# EAGLE board SparkFun_Qwiic_Speaker_Amp-Panel (EAGLE 9.6.2), part 1 of 2
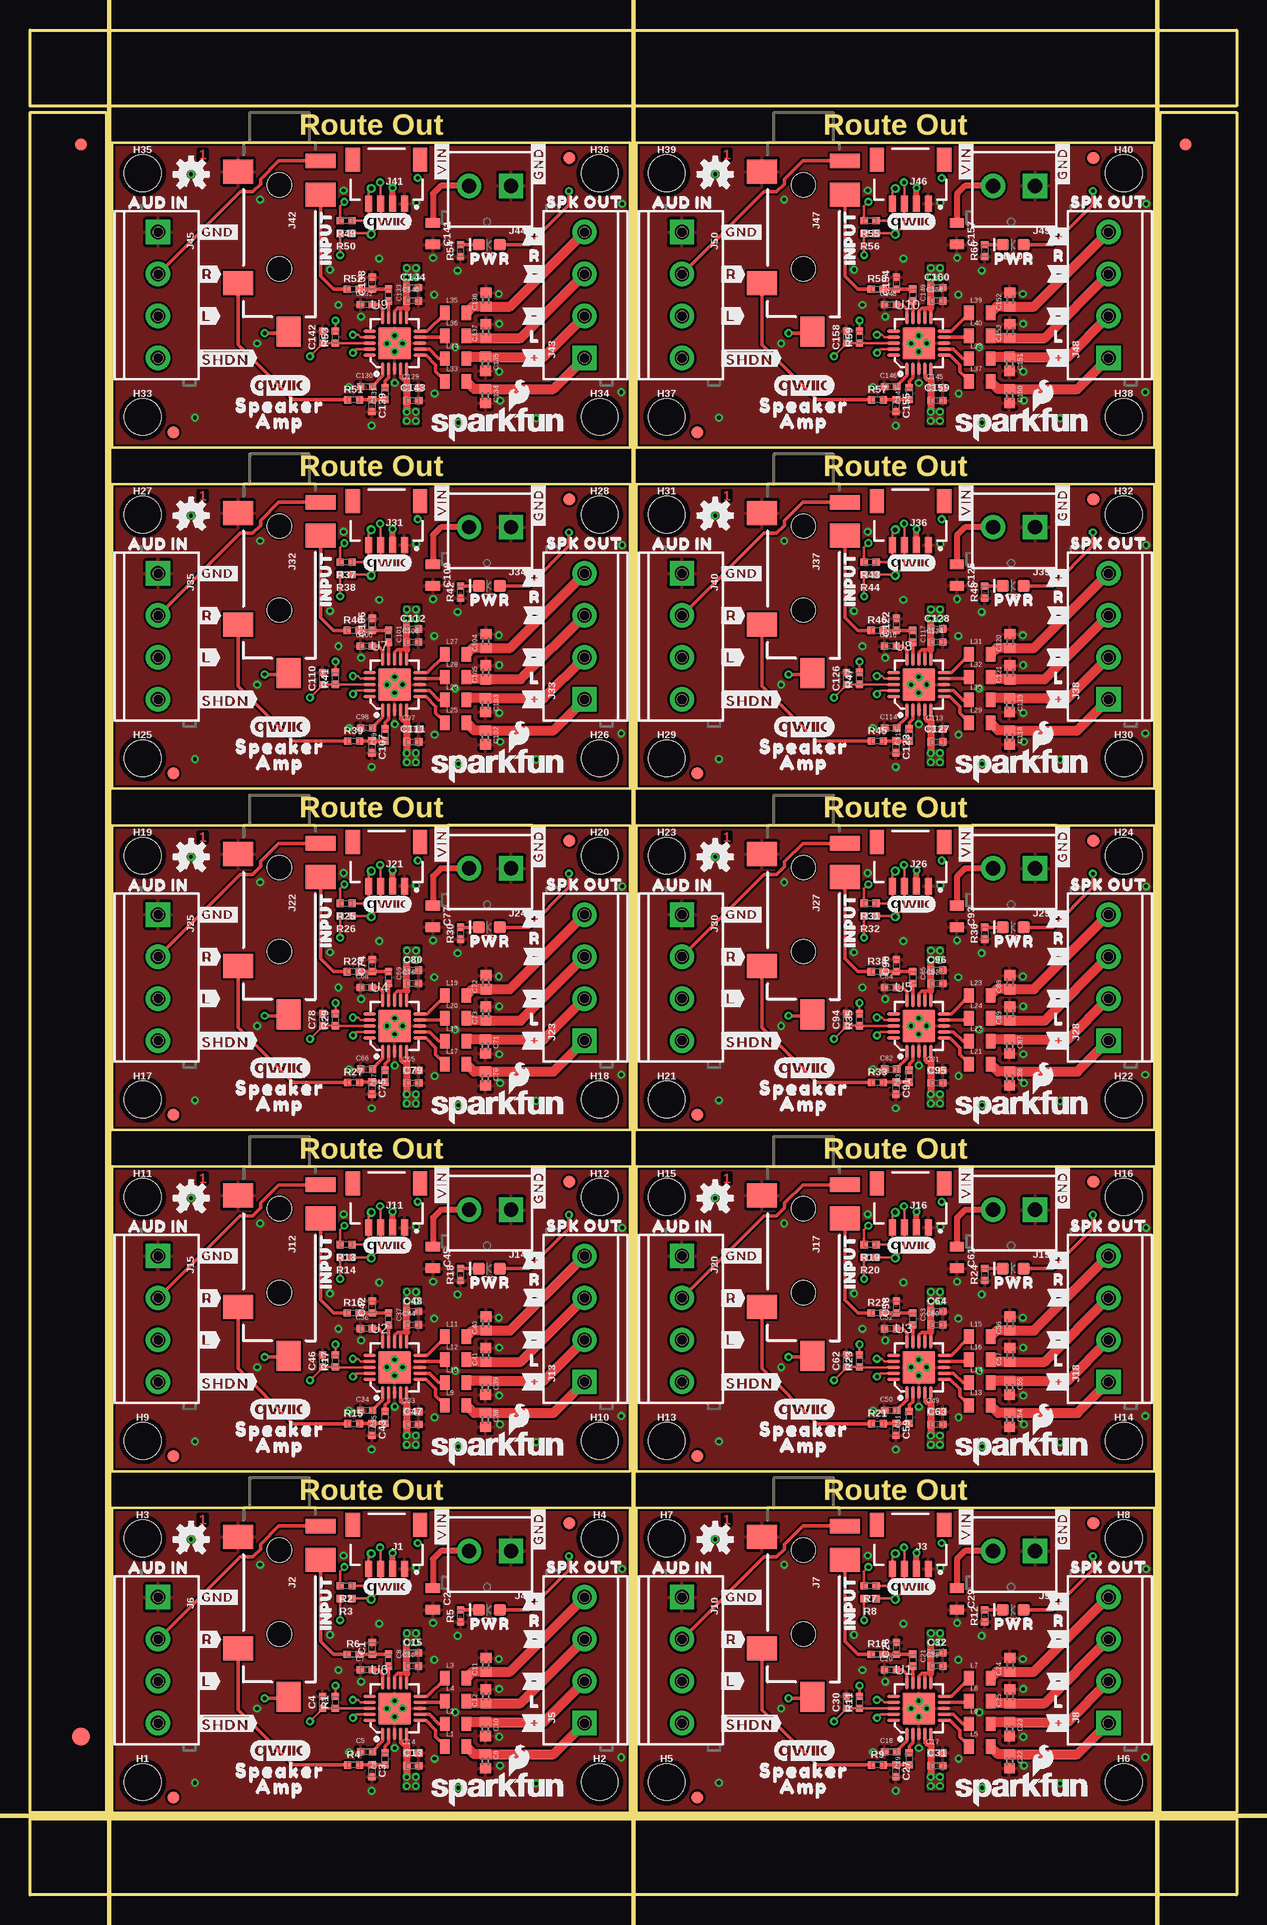
[diagram p0: board, top side]
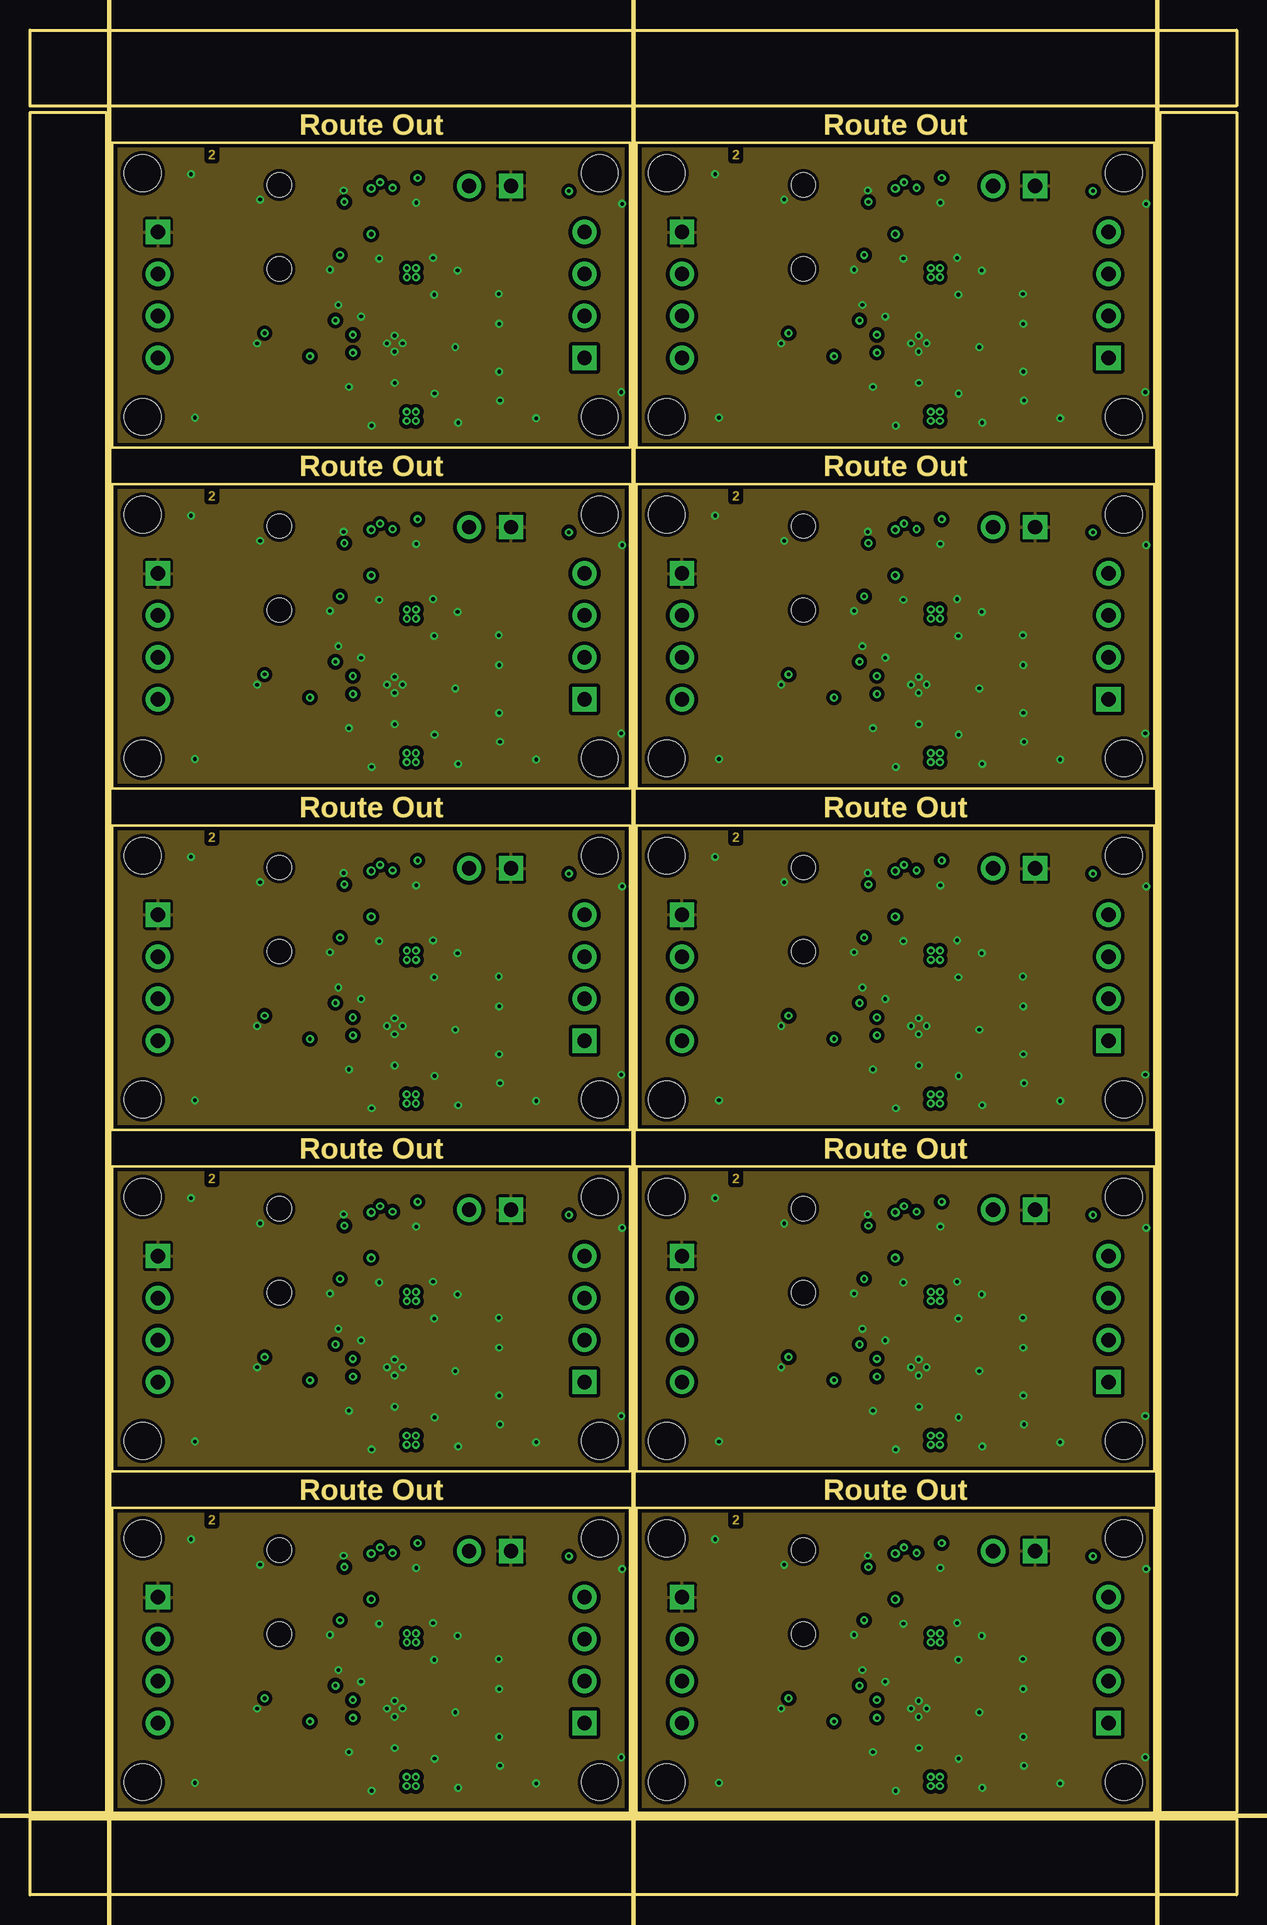
[diagram p1: board, inner layer Route2]
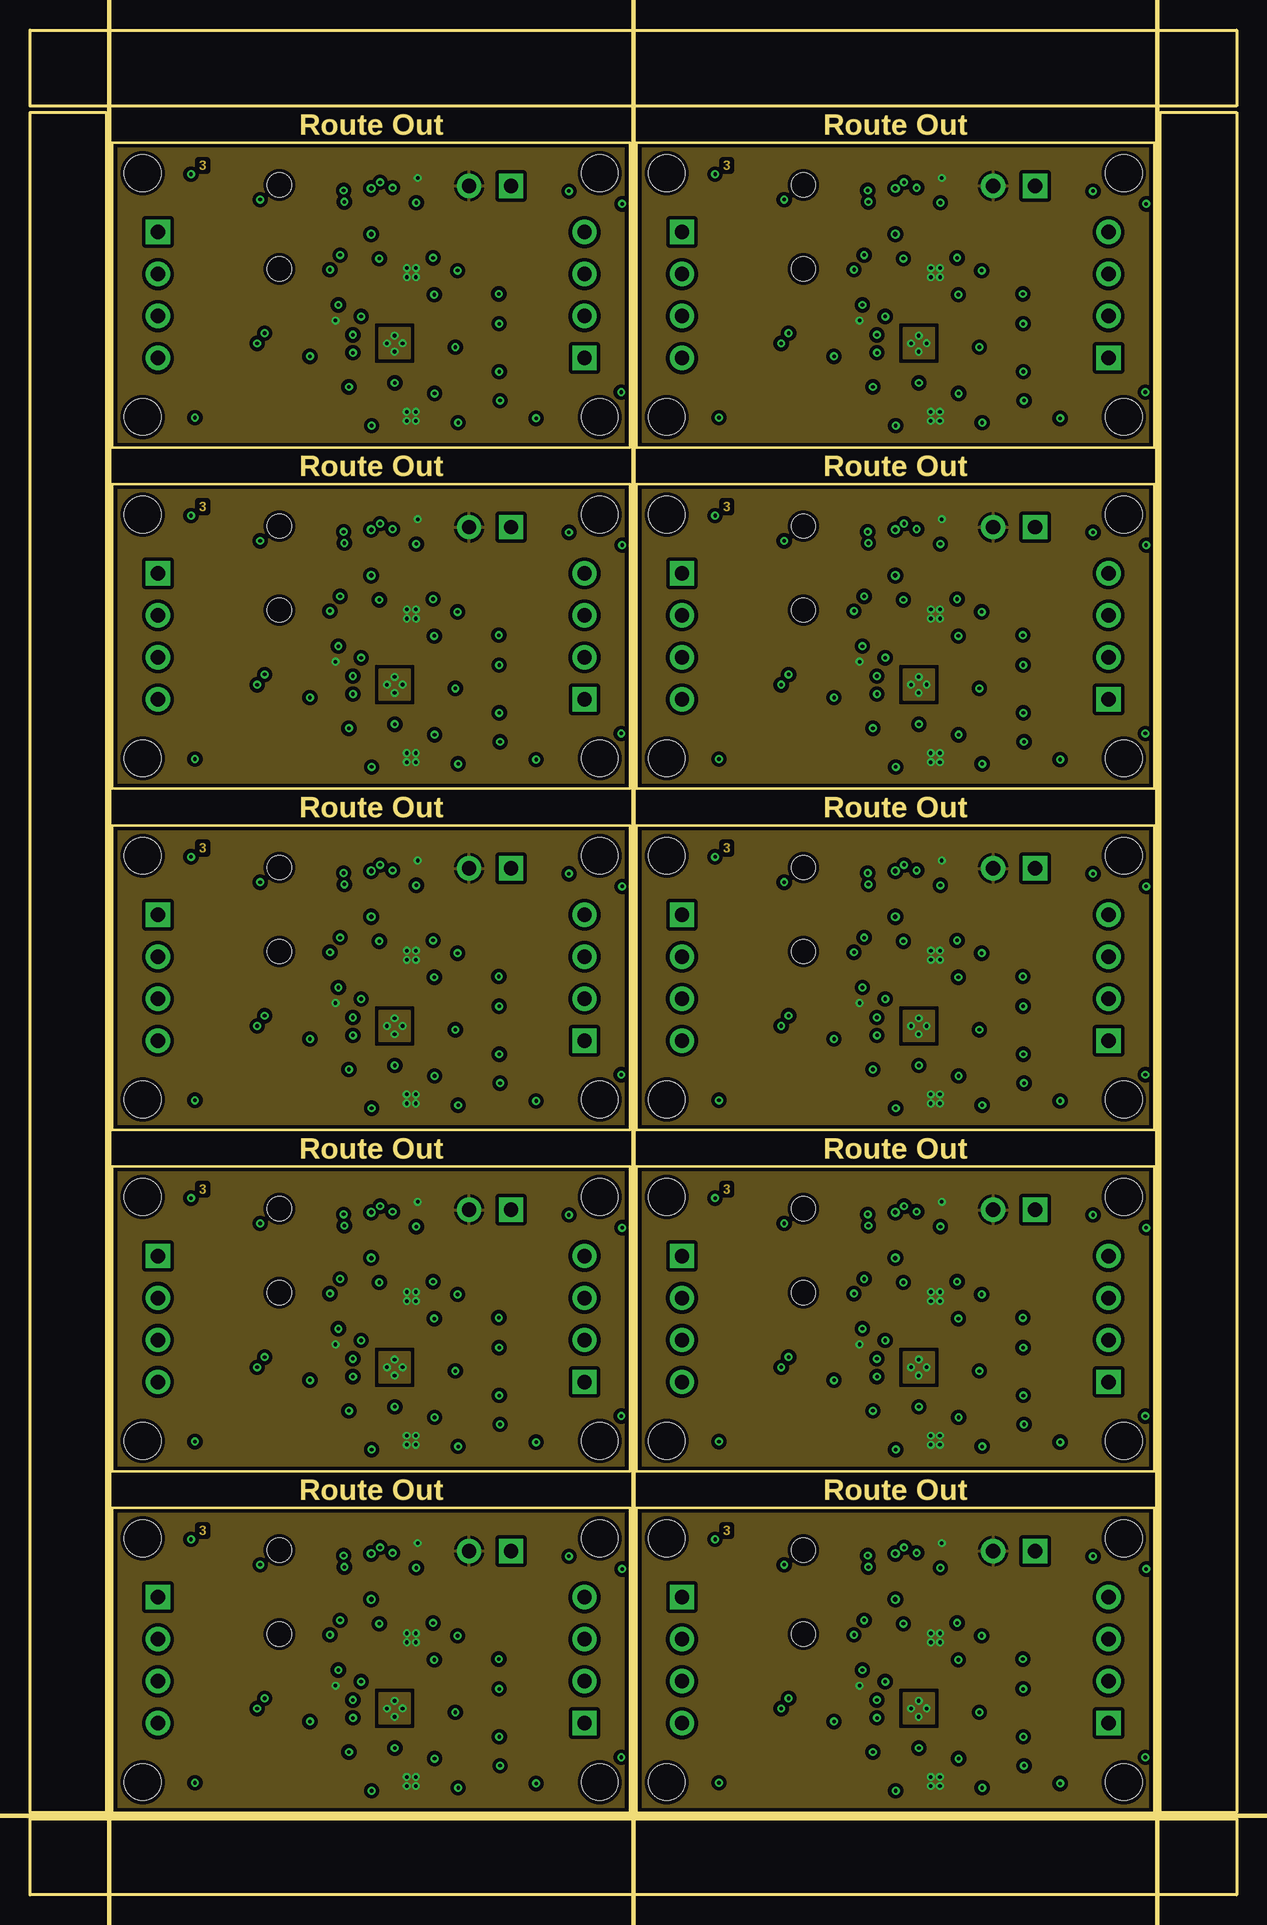
[diagram p2: board, inner layer Route15]
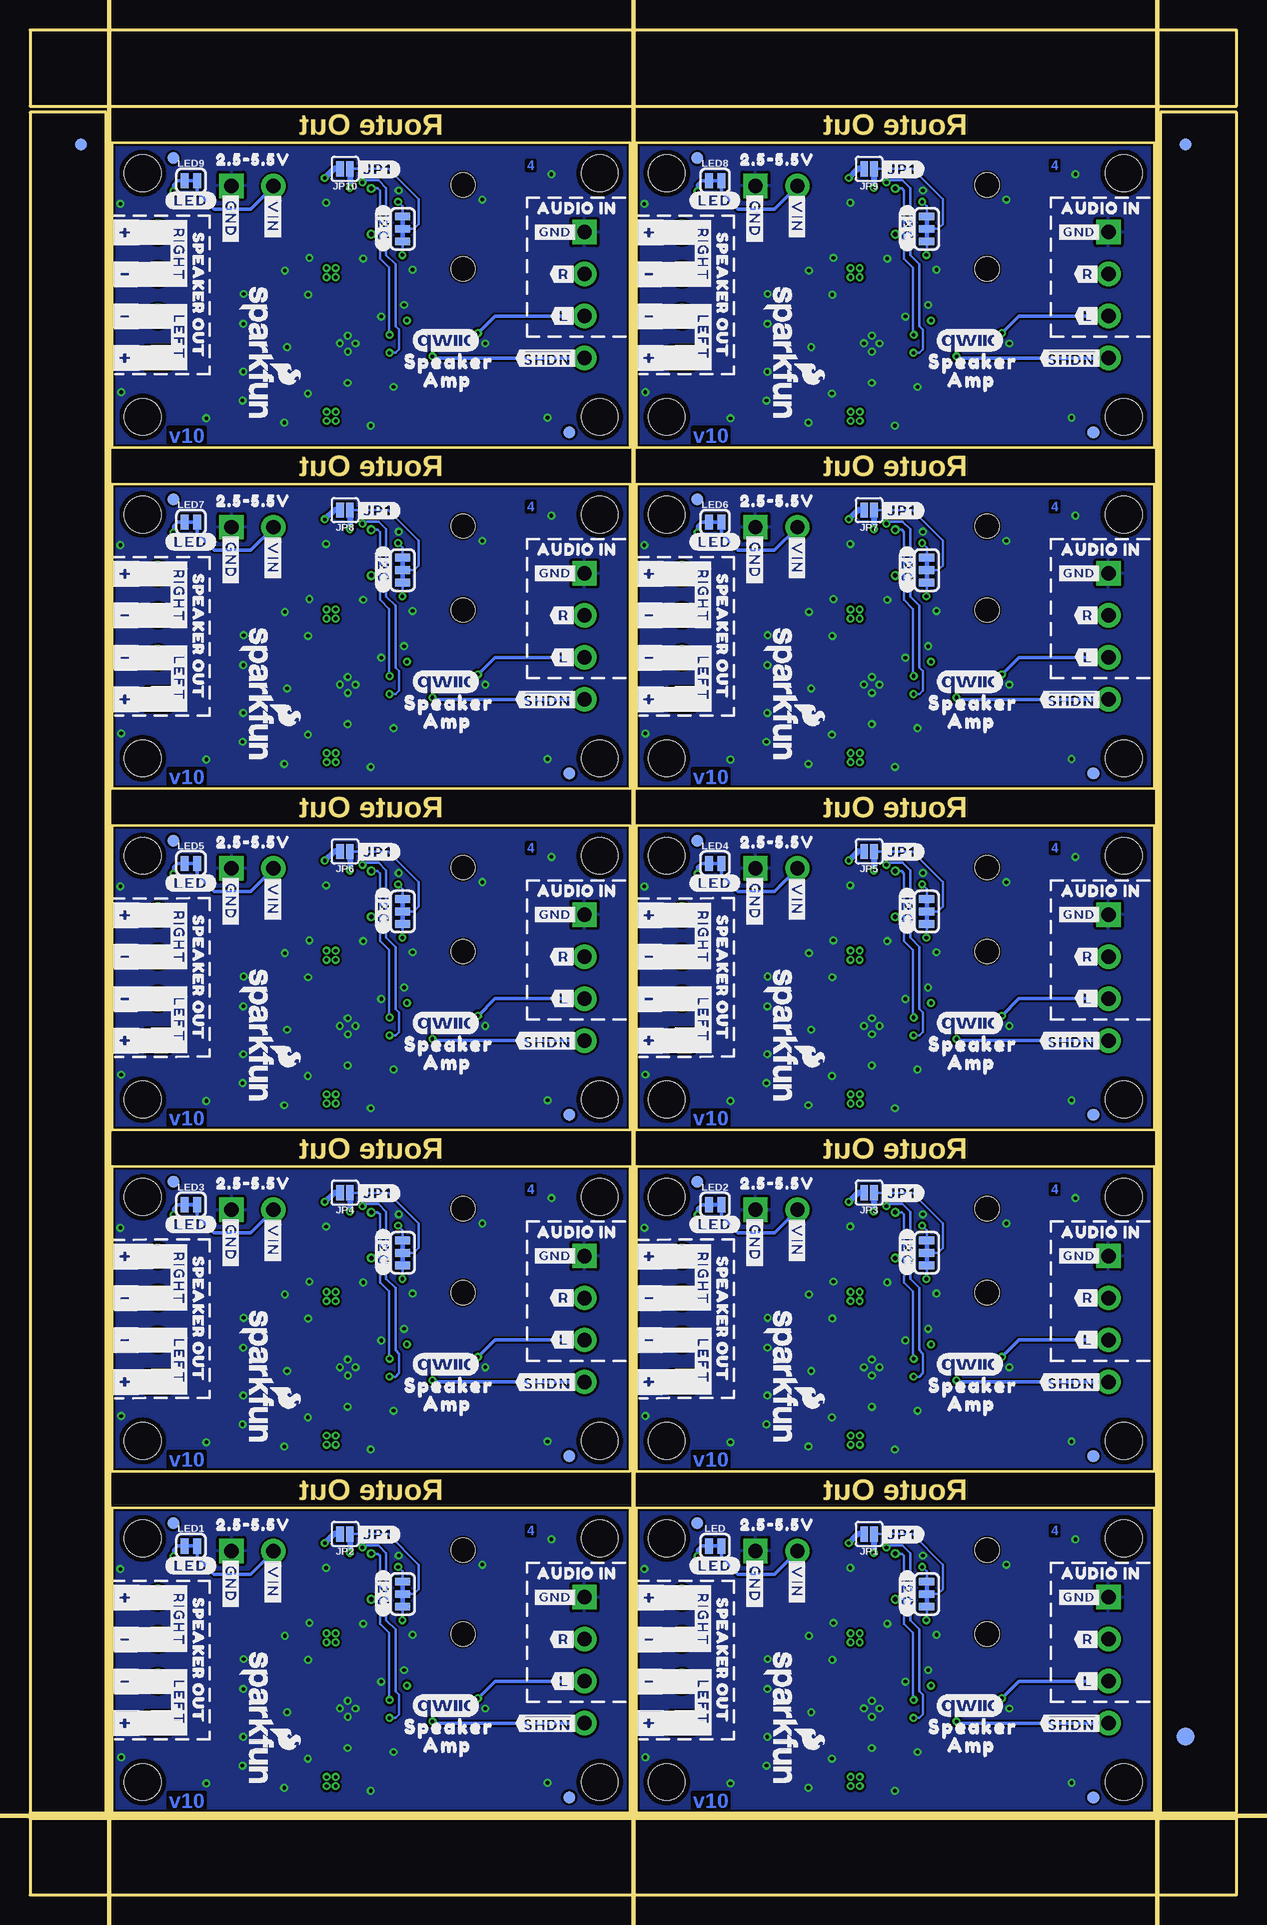
[diagram p3: board, bottom side, seen from below]

Size 100.58 x 155.45 mm. Coordinates in mm from the lower left corner, seen from the top.
Outline: 6.86,6.86 50.04,6.86 50.04,32.26 6.86,32.26 6.86,6.86
Outline: 50.55,6.86 93.73,6.86 93.73,32.26 50.55,32.26 50.55,6.86
Outline: 6.86,35.31 50.04,35.31 50.04,60.71 6.86,60.71 6.86,35.31
Outline: 50.55,35.31 93.73,35.31 93.73,60.71 50.55,60.71 50.55,35.31
Outline: 6.86,63.75 50.04,63.75 50.04,89.15 6.86,89.15 6.86,63.75
Outline: 50.55,63.75 93.73,63.75 93.73,89.15 50.55,89.15 50.55,63.75
Outline: 6.86,92.2 50.04,92.2 50.04,117.6 6.86,117.6 6.86,92.2
Outline: 50.55,92.2 93.73,92.2 93.73,117.6 50.55,117.6 50.55,92.2
Outline: 6.86,120.65 50.04,120.65 50.04,146.05 6.86,146.05 6.86,120.65
Outline: 50.55,120.65 93.73,120.65 93.73,146.05 50.55,146.05 50.55,120.65
Outline: 0,6.35 100.58,6.35 100.58,0 0,0 0,6.35
Outline: 94.23,148.59 100.58,148.59 100.58,6.86 94.23,6.86 94.23,148.59
Outline: 0,155.45 100.58,155.45 100.58,149.1 0,149.1 0,155.45
Outline: 0,148.59 6.35,148.59 6.35,6.86 0,6.86 0,148.59
Copper layers (1+2*15+16): Top 0.035559375mm / dielectric 0.47751875mm / Route2 0.035559375mm / dielectric 0.47751875mm / Route15 0.035559375mm / dielectric 0.47751875mm / Bottom 0.035559375mm
Design rules "SparkFun_Qwiic_Speaker_Amp": minimum track width 7mil, minimum drill 12mil, track to track 7mil, track to pad 7mil, pad to pad 7mil, via to via 7mil, smd to smd 7mil, copper to edge 7mil, drill to drill 7mil, minimum pad ring 7mil, minimum via ring 7mil, stop-mask expansion 3mil, vias tented up to drill 25mil, thermal gap 10mil
Milling: 4 lines

## Footprints (pad centres in the part's own frame; a part is rotated, then mirrored left to right if it is on the bottom)
0402-TIGHT = smd 0.6 x 0.6: 1 -0.5,0; 2 0.5,0
0805 = smd 0.8 x 1.2: 1 -0.9,0; 2 0.9,0
0402 = smd 0.85 x 0.9: 1 -0.58,0; 2 0.58,0
LED-0603 = smd 1 x 1: A -0.877,0; C 0.877,0
FIDUCIAL-1X2 = smd 1 x 1: 1 0,0
FIDUCIAL-1.5X3 = smd 1.5 x 1.5: 1 0,0
STAND-OFF-TIGHT = hole 3.048: 0,0
SMT-JUMPER_3_2-NC_TRACE_SILK = smd 0.66 x 1.27: 1 -1.041,0; 2 0,0; 3 1.041,0
JST04_1MM_RA = smd 0.6 x 1.35: 1 -1.5,0; 2 -0.5,0; 3 0.5,0; 4 1.5,0 | smd 1.2 x 2: NC1 2.8,-3.675; NC2 -2.8,-3.675
AUDIO-JACK-3.5MM-SMD = smd 2 x 2.5: RING 4.3,3.45; SLEEVE 2.4,-3.45; TIP 11.7,-3.45 | smd 1.2 x 2.5: RSH 1.5,3.45 | smd 2.5 x 2: TSH 15.75,0.75 | hole 2: 3.5,0; 10.5,0
SCREWTERMINAL-3.5MM-2 = drill 1.2 pad 2.032 square: 1 0,0 | drill 1.2 pad 2.032: 2 3.5,0
SCREWTERMINAL-3.5MM-4 = drill 1.2 pad 2.032 square: 1 0,0 | drill 1.2 pad 2.032: 2 3.5,0; 3 7,0; 4 10.5,0
SMT-JUMPER_2_NO_SILK = smd 0.635 x 1.27: 1 -0.406,0; 2 0.406,0
SMT-JUMPER_2_NC_TRACE_SILK = smd 0.66 x 1.27: 1 -0.521,0; 2 0.521,0
TP_15TH = drill 0.381 pad 0.61: 1 0,0
QFN-20-0.5MM = smd 0.28 x 1.05: 1 -1,-2.1; 2 -0.5,-2.1; 3 0,-2.1; 4 0.5,-2.1; 5 1,-2.1; 11 1,2.1; 12 0.5,2.1; 13 0,2.1; 14 -0.5,2.1; 15 -1,2.1 | smd 1.05 x 0.28: 6 2.1,-1; 7 2.1,-0.5; 8 2.1,0; 9 2.1,0.5; 10 2.1,1; 16 -2.1,1; 17 -2.1,0.5; 18 -2.1,0; 19 -2.1,-0.5; 20 -2.1,-1 | smd 2.7 x 2.7: PAD 0,0

## Placement (x,y rotation side)
C1  47nF  [0402-TIGHT]  28.53,20.56 90 top
C2  10uF  [0805]  33.58,24.68 270 top
C3  47nF  [0402-TIGHT]  28.5,10.35 270 top
C4  0.1uF  [0402-TIGHT]  24.38,16.05 90 top
C5  1.0uF  [0402-TIGHT]  28.06,11.93 0 top
C6  1.0uF  [0402-TIGHT]  29.61,11.35 90 top
C7  1.0uF  [0402-TIGHT]  28.04,18.75 0 top
C8  1.0uF  [0402-TIGHT]  29.9,19.57 270 top
C9  1nF  [0402]  37.97,11.14 270 top
C10  1nF  [0402]  37.98,13.82 270 top
C11  1nF  [0402]  38.01,19.17 90 top
C12  1nF  [0402]  38.01,16.56 90 top
C13  1.0uF  [0402-TIGHT]  31.91,10.77 0 top
C14  0.1uF  [0402-TIGHT]  31.91,11.83 0 top
C15  1.0uF  [0402-TIGHT]  31.91,20.18 0 top
C16  0.1uF  [0402-TIGHT]  31.91,19.08 0 top
C17  0.1uF  [0402-TIGHT]  75.6,11.83 0 top
C18  1.0uF  [0402-TIGHT]  71.75,11.93 0 top
C19  1.0uF  [0402-TIGHT]  73.3,11.35 90 top
C20  1.0uF  [0402-TIGHT]  71.73,18.75 0 top
C21  1.0uF  [0402-TIGHT]  73.58,19.57 270 top
C22  1nF  [0402]  81.66,11.14 270 top
C23  1nF  [0402]  81.66,13.82 270 top
C24  1nF  [0402]  81.7,19.17 90 top
C25  1nF  [0402]  81.69,16.56 90 top
C26  47nF  [0402-TIGHT]  72.22,20.56 90 top
C27  47nF  [0402-TIGHT]  72.19,10.35 270 top
C28  0.1uF  [0402-TIGHT]  75.6,19.08 0 top
C29  10uF  [0805]  77.27,24.68 270 top
C30  0.1uF  [0402-TIGHT]  68.07,16.05 90 top
C31  1.0uF  [0402-TIGHT]  75.6,10.77 0 top
C32  1.0uF  [0402-TIGHT]  75.6,20.18 0 top
C33  0.1uF  [0402-TIGHT]  31.91,40.28 0 top
C34  1.0uF  [0402-TIGHT]  28.06,40.37 0 top
C35  1.0uF  [0402-TIGHT]  29.61,39.8 90 top
C36  1.0uF  [0402-TIGHT]  28.04,47.2 0 top
C37  1.0uF  [0402-TIGHT]  29.9,48.02 270 top
C38  1nF  [0402]  37.97,39.59 270 top
C39  1nF  [0402]  37.98,42.27 270 top
C40  1nF  [0402]  38.01,47.62 90 top
C41  1nF  [0402]  38.01,45.01 90 top
C42  47nF  [0402-TIGHT]  28.53,49.01 90 top
C43  47nF  [0402-TIGHT]  28.5,38.8 270 top
C44  0.1uF  [0402-TIGHT]  31.91,47.52 0 top
C45  10uF  [0805]  33.58,53.12 270 top
C46  0.1uF  [0402-TIGHT]  24.38,44.5 90 top
C47  1.0uF  [0402-TIGHT]  31.91,39.22 0 top
C48  1.0uF  [0402-TIGHT]  31.91,48.63 0 top
C49  0.1uF  [0402-TIGHT]  75.6,40.28 0 top
C50  1.0uF  [0402-TIGHT]  71.75,40.37 0 top
C51  1.0uF  [0402-TIGHT]  73.3,39.8 90 top
C52  1.0uF  [0402-TIGHT]  71.73,47.2 0 top
C53  1.0uF  [0402-TIGHT]  73.58,48.02 270 top
C54  1nF  [0402]  81.66,39.59 270 top
C55  1nF  [0402]  81.66,42.27 270 top
C56  1nF  [0402]  81.7,47.62 90 top
C57  1nF  [0402]  81.69,45.01 90 top
C58  47nF  [0402-TIGHT]  72.22,49.01 90 top
C59  47nF  [0402-TIGHT]  72.19,38.8 270 top
C60  0.1uF  [0402-TIGHT]  75.6,47.52 0 top
C61  10uF  [0805]  77.27,53.12 270 top
C62  0.1uF  [0402-TIGHT]  68.07,44.5 90 top
C63  1.0uF  [0402-TIGHT]  75.6,39.22 0 top
C64  1.0uF  [0402-TIGHT]  75.6,48.63 0 top
C65  0.1uF  [0402-TIGHT]  31.91,68.72 0 top
C66  1.0uF  [0402-TIGHT]  28.06,68.82 0 top
C67  1.0uF  [0402-TIGHT]  29.61,68.25 90 top
C68  1.0uF  [0402-TIGHT]  28.04,75.65 0 top
C69  1.0uF  [0402-TIGHT]  29.9,76.46 270 top
C70  1nF  [0402]  37.97,68.04 270 top
C71  1nF  [0402]  37.98,70.72 270 top
C72  1nF  [0402]  38.01,76.07 90 top
C73  1nF  [0402]  38.01,73.46 90 top
C74  47nF  [0402-TIGHT]  28.53,77.46 90 top
C75  47nF  [0402-TIGHT]  28.5,67.24 270 top
C76  0.1uF  [0402-TIGHT]  31.91,75.97 0 top
C77  10uF  [0805]  33.58,81.57 270 top
C78  0.1uF  [0402-TIGHT]  24.38,72.95 90 top
C79  1.0uF  [0402-TIGHT]  31.91,67.67 0 top
C80  1.0uF  [0402-TIGHT]  31.91,77.08 0 top
C81  0.1uF  [0402-TIGHT]  75.6,68.72 0 top
C82  1.0uF  [0402-TIGHT]  71.75,68.82 0 top
C83  1.0uF  [0402-TIGHT]  73.3,68.25 90 top
C84  1.0uF  [0402-TIGHT]  71.73,75.65 0 top
C85  1.0uF  [0402-TIGHT]  73.58,76.46 270 top
C86  1nF  [0402]  81.66,68.04 270 top
C87  1nF  [0402]  81.66,70.72 270 top
C88  1nF  [0402]  81.7,76.07 90 top
C89  1nF  [0402]  81.69,73.46 90 top
C90  47nF  [0402-TIGHT]  72.22,77.46 90 top
C91  47nF  [0402-TIGHT]  72.19,67.24 270 top
C92  0.1uF  [0402-TIGHT]  75.6,75.97 0 top
C93  10uF  [0805]  77.27,81.57 270 top
C94  0.1uF  [0402-TIGHT]  68.07,72.95 90 top
C95  1.0uF  [0402-TIGHT]  75.6,67.67 0 top
C96  1.0uF  [0402-TIGHT]  75.6,77.08 0 top
C97  0.1uF  [0402-TIGHT]  31.91,97.17 0 top
C98  1.0uF  [0402-TIGHT]  28.06,97.27 0 top
C99  1.0uF  [0402-TIGHT]  29.61,96.7 90 top
C100  1.0uF  [0402-TIGHT]  28.04,104.09 0 top
C101  1.0uF  [0402-TIGHT]  29.9,104.91 270 top
C102  1nF  [0402]  37.97,96.48 270 top
C103  1nF  [0402]  37.98,99.17 270 top
C104  1nF  [0402]  38.01,104.52 90 top
C105  1nF  [0402]  38.01,101.9 90 top
C106  47nF  [0402-TIGHT]  28.53,105.91 90 top
C107  47nF  [0402-TIGHT]  28.5,95.69 270 top
C108  0.1uF  [0402-TIGHT]  31.91,104.42 0 top
C109  10uF  [0805]  33.58,110.02 270 top
C110  0.1uF  [0402-TIGHT]  24.38,101.4 90 top
C111  1.0uF  [0402-TIGHT]  31.91,96.11 0 top
C112  1.0uF  [0402-TIGHT]  31.91,105.52 0 top
C113  0.1uF  [0402-TIGHT]  75.6,97.17 0 top
C114  1.0uF  [0402-TIGHT]  71.75,97.27 0 top
C115  1.0uF  [0402-TIGHT]  73.3,96.7 90 top
C116  1.0uF  [0402-TIGHT]  71.73,104.09 0 top
C117  1.0uF  [0402-TIGHT]  73.58,104.91 270 top
C118  1nF  [0402]  81.66,96.48 270 top
C119  1nF  [0402]  81.66,99.17 270 top
C120  1nF  [0402]  81.7,104.52 90 top
C121  1nF  [0402]  81.69,101.9 90 top
C122  47nF  [0402-TIGHT]  72.22,105.91 90 top
C123  47nF  [0402-TIGHT]  72.19,95.69 270 top
C124  0.1uF  [0402-TIGHT]  75.6,104.42 0 top
C125  10uF  [0805]  77.27,110.02 270 top
C126  0.1uF  [0402-TIGHT]  68.07,101.4 90 top
C127  1.0uF  [0402-TIGHT]  75.6,96.11 0 top
C128  1.0uF  [0402-TIGHT]  75.6,105.52 0 top
C129  0.1uF  [0402-TIGHT]  31.91,125.62 0 top
C130  1.0uF  [0402-TIGHT]  28.06,125.72 0 top
C131  1.0uF  [0402-TIGHT]  29.61,125.14 90 top
C132  1.0uF  [0402-TIGHT]  28.04,132.54 0 top
C133  1.0uF  [0402-TIGHT]  29.9,133.36 270 top
C134  1nF  [0402]  37.97,124.93 270 top
C135  1nF  [0402]  37.98,127.61 270 top
C136  1nF  [0402]  38.01,132.97 90 top
C137  1nF  [0402]  38.01,130.35 90 top
C138  47nF  [0402-TIGHT]  28.53,134.35 90 top
C139  47nF  [0402-TIGHT]  28.5,124.14 270 top
C140  0.1uF  [0402-TIGHT]  31.91,132.87 0 top
C141  10uF  [0805]  33.58,138.47 270 top
C142  0.1uF  [0402-TIGHT]  24.38,129.84 90 top
C143  1.0uF  [0402-TIGHT]  31.91,124.56 0 top
C144  1.0uF  [0402-TIGHT]  31.91,133.97 0 top
C145  0.1uF  [0402-TIGHT]  75.6,125.62 0 top
C146  1.0uF  [0402-TIGHT]  71.75,125.72 0 top
C147  1.0uF  [0402-TIGHT]  73.3,125.14 90 top
C148  1.0uF  [0402-TIGHT]  71.73,132.54 0 top
C149  1.0uF  [0402-TIGHT]  73.58,133.36 270 top
C150  1nF  [0402]  81.66,124.93 270 top
C151  1nF  [0402]  81.66,127.61 270 top
C152  1nF  [0402]  81.7,132.97 90 top
C153  1nF  [0402]  81.69,130.35 90 top
C154  47nF  [0402-TIGHT]  72.22,134.35 90 top
C155  47nF  [0402-TIGHT]  72.19,124.14 270 top
C156  0.1uF  [0402-TIGHT]  75.6,132.87 0 top
C157  10uF  [0805]  77.27,138.47 270 top
C158  0.1uF  [0402-TIGHT]  68.07,129.84 90 top
C159  1.0uF  [0402-TIGHT]  75.6,124.56 0 top
C160  1.0uF  [0402-TIGHT]  75.6,133.97 0 top
D1  RED  [LED-0603]  38.28,23.76 180 top
D2  RED  [LED-0603]  81.97,23.76 180 top
D3  RED  [LED-0603]  38.28,52.21 180 top
D4  RED  [LED-0603]  81.97,52.21 180 top
D5  RED  [LED-0603]  38.28,80.66 180 top
D6  RED  [LED-0603]  81.97,80.66 180 top
D7  RED  [LED-0603]  38.28,109.1 180 top
D8  RED  [LED-0603]  81.97,109.1 180 top
D9  RED  [LED-0603]  38.28,137.55 180 top
D10  RED  [LED-0603]  81.97,137.55 180 top
E$1  [FIDUCIAL-1X2]  4.23,145.92 0 top
E$2  [FIDUCIAL-1X2]  4.23,145.92 0 bottom
E$3  [FIDUCIAL-1X2]  96.35,145.92 0 top
E$4  [FIDUCIAL-1X2]  96.35,145.92 0 bottom
E$5  [FIDUCIAL-1.5X3]  4.23,13.21 0 top
E$6  [FIDUCIAL-1.5X3]  4.23,13.21 0 bottom
FD1  FIDUCIAL1X2  [FIDUCIAL-1X2]  11.94,8.13 0 top
FD2  FIDUCIAL1X2  [FIDUCIAL-1X2]  11.94,8.13 0 bottom
FD3  FIDUCIAL1X2  [FIDUCIAL-1X2]  44.96,30.99 0 top
FD4  FIDUCIAL1X2  [FIDUCIAL-1X2]  44.96,30.99 0 bottom
FD5  FIDUCIAL1X2  [FIDUCIAL-1X2]  55.63,8.13 0 top
FD6  FIDUCIAL1X2  [FIDUCIAL-1X2]  55.63,8.13 0 bottom
FD7  FIDUCIAL1X2  [FIDUCIAL-1X2]  88.65,30.99 0 top
FD8  FIDUCIAL1X2  [FIDUCIAL-1X2]  88.65,30.99 0 bottom
FD9  FIDUCIAL1X2  [FIDUCIAL-1X2]  11.94,36.58 0 top
FD10  FIDUCIAL1X2  [FIDUCIAL-1X2]  11.94,36.58 0 bottom
FD11  FIDUCIAL1X2  [FIDUCIAL-1X2]  44.96,59.44 0 top
FD12  FIDUCIAL1X2  [FIDUCIAL-1X2]  44.96,59.44 0 bottom
FD13  FIDUCIAL1X2  [FIDUCIAL-1X2]  55.63,36.58 0 top
FD14  FIDUCIAL1X2  [FIDUCIAL-1X2]  55.63,36.58 0 bottom
FD15  FIDUCIAL1X2  [FIDUCIAL-1X2]  88.65,59.44 0 top
FD16  FIDUCIAL1X2  [FIDUCIAL-1X2]  88.65,59.44 0 bottom
FD17  FIDUCIAL1X2  [FIDUCIAL-1X2]  11.94,65.02 0 top
FD18  FIDUCIAL1X2  [FIDUCIAL-1X2]  11.94,65.02 0 bottom
FD19  FIDUCIAL1X2  [FIDUCIAL-1X2]  44.96,87.88 0 top
FD20  FIDUCIAL1X2  [FIDUCIAL-1X2]  44.96,87.88 0 bottom
FD21  FIDUCIAL1X2  [FIDUCIAL-1X2]  55.63,65.02 0 top
FD22  FIDUCIAL1X2  [FIDUCIAL-1X2]  55.63,65.02 0 bottom
FD23  FIDUCIAL1X2  [FIDUCIAL-1X2]  88.65,87.88 0 top
FD24  FIDUCIAL1X2  [FIDUCIAL-1X2]  88.65,87.88 0 bottom
FD25  FIDUCIAL1X2  [FIDUCIAL-1X2]  11.94,93.47 0 top
FD26  FIDUCIAL1X2  [FIDUCIAL-1X2]  11.94,93.47 0 bottom
FD27  FIDUCIAL1X2  [FIDUCIAL-1X2]  44.96,116.33 0 top
FD28  FIDUCIAL1X2  [FIDUCIAL-1X2]  44.96,116.33 0 bottom
FD29  FIDUCIAL1X2  [FIDUCIAL-1X2]  55.63,93.47 0 top
FD30  FIDUCIAL1X2  [FIDUCIAL-1X2]  55.63,93.47 0 bottom
FD31  FIDUCIAL1X2  [FIDUCIAL-1X2]  88.65,116.33 0 top
FD32  FIDUCIAL1X2  [FIDUCIAL-1X2]  88.65,116.33 0 bottom
FD33  FIDUCIAL1X2  [FIDUCIAL-1X2]  11.94,121.92 0 top
FD34  FIDUCIAL1X2  [FIDUCIAL-1X2]  11.94,121.92 0 bottom
FD35  FIDUCIAL1X2  [FIDUCIAL-1X2]  44.96,144.78 0 top
FD36  FIDUCIAL1X2  [FIDUCIAL-1X2]  44.96,144.78 0 bottom
FD37  FIDUCIAL1X2  [FIDUCIAL-1X2]  55.63,121.92 0 top
FD38  FIDUCIAL1X2  [FIDUCIAL-1X2]  55.63,121.92 0 bottom
FD39  FIDUCIAL1X2  [FIDUCIAL-1X2]  88.65,144.78 0 top
FD40  FIDUCIAL1X2  [FIDUCIAL-1X2]  88.65,144.78 0 bottom
H1  STAND-OFFTIGHT  [STAND-OFF-TIGHT]  9.4,9.4 0 top
H2  STAND-OFFTIGHT  [STAND-OFF-TIGHT]  47.5,9.4 0 top
H3  STAND-OFFTIGHT  [STAND-OFF-TIGHT]  9.4,29.72 0 top
H4  STAND-OFFTIGHT  [STAND-OFF-TIGHT]  47.5,29.72 0 top
H5  STAND-OFFTIGHT  [STAND-OFF-TIGHT]  53.09,9.4 0 top
H6  STAND-OFFTIGHT  [STAND-OFF-TIGHT]  91.19,9.4 0 top
H7  STAND-OFFTIGHT  [STAND-OFF-TIGHT]  53.09,29.72 0 top
H8  STAND-OFFTIGHT  [STAND-OFF-TIGHT]  91.19,29.72 0 top
H9  STAND-OFFTIGHT  [STAND-OFF-TIGHT]  9.4,37.85 0 top
H10  STAND-OFFTIGHT  [STAND-OFF-TIGHT]  47.5,37.85 0 top
H11  STAND-OFFTIGHT  [STAND-OFF-TIGHT]  9.4,58.17 0 top
H12  STAND-OFFTIGHT  [STAND-OFF-TIGHT]  47.5,58.17 0 top
H13  STAND-OFFTIGHT  [STAND-OFF-TIGHT]  53.09,37.85 0 top
H14  STAND-OFFTIGHT  [STAND-OFF-TIGHT]  91.19,37.85 0 top
H15  STAND-OFFTIGHT  [STAND-OFF-TIGHT]  53.09,58.17 0 top
H16  STAND-OFFTIGHT  [STAND-OFF-TIGHT]  91.19,58.17 0 top
H17  STAND-OFFTIGHT  [STAND-OFF-TIGHT]  9.4,66.29 0 top
H18  STAND-OFFTIGHT  [STAND-OFF-TIGHT]  47.5,66.29 0 top
H19  STAND-OFFTIGHT  [STAND-OFF-TIGHT]  9.4,86.61 0 top
H20  STAND-OFFTIGHT  [STAND-OFF-TIGHT]  47.5,86.61 0 top
H21  STAND-OFFTIGHT  [STAND-OFF-TIGHT]  53.09,66.29 0 top
H22  STAND-OFFTIGHT  [STAND-OFF-TIGHT]  91.19,66.29 0 top
H23  STAND-OFFTIGHT  [STAND-OFF-TIGHT]  53.09,86.61 0 top
H24  STAND-OFFTIGHT  [STAND-OFF-TIGHT]  91.19,86.61 0 top
H25  STAND-OFFTIGHT  [STAND-OFF-TIGHT]  9.4,94.74 0 top
H26  STAND-OFFTIGHT  [STAND-OFF-TIGHT]  47.5,94.74 0 top
H27  STAND-OFFTIGHT  [STAND-OFF-TIGHT]  9.4,115.06 0 top
H28  STAND-OFFTIGHT  [STAND-OFF-TIGHT]  47.5,115.06 0 top
H29  STAND-OFFTIGHT  [STAND-OFF-TIGHT]  53.09,94.74 0 top
H30  STAND-OFFTIGHT  [STAND-OFF-TIGHT]  91.19,94.74 0 top
H31  STAND-OFFTIGHT  [STAND-OFF-TIGHT]  53.09,115.06 0 top
H32  STAND-OFFTIGHT  [STAND-OFF-TIGHT]  91.19,115.06 0 top
H33  STAND-OFFTIGHT  [STAND-OFF-TIGHT]  9.4,123.19 0 top
H34  STAND-OFFTIGHT  [STAND-OFF-TIGHT]  47.5,123.19 0 top
H35  STAND-OFFTIGHT  [STAND-OFF-TIGHT]  9.4,143.51 0 top
H36  STAND-OFFTIGHT  [STAND-OFF-TIGHT]  47.5,143.51 0 top
H37  STAND-OFFTIGHT  [STAND-OFF-TIGHT]  53.09,123.19 0 top
H38  STAND-OFFTIGHT  [STAND-OFF-TIGHT]  91.19,123.19 0 top
H39  STAND-OFFTIGHT  [STAND-OFF-TIGHT]  53.09,143.51 0 top
H40  STAND-OFFTIGHT  [STAND-OFF-TIGHT]  91.19,143.51 0 top
I2C  JUMPER-SMT_3_2-NC_TRACE_SILK  [SMT-JUMPER_3_2-NC_TRACE_SILK]  25.83,25.07 90 bottom
I2C1  JUMPER-SMT_3_2-NC_TRACE_SILK  [SMT-JUMPER_3_2-NC_TRACE_SILK]  69.52,25.07 90 bottom
I2C2  JUMPER-SMT_3_2-NC_TRACE_SILK  [SMT-JUMPER_3_2-NC_TRACE_SILK]  25.83,53.52 90 bottom
I2C3  JUMPER-SMT_3_2-NC_TRACE_SILK  [SMT-JUMPER_3_2-NC_TRACE_SILK]  69.52,53.52 90 bottom
I2C4  JUMPER-SMT_3_2-NC_TRACE_SILK  [SMT-JUMPER_3_2-NC_TRACE_SILK]  25.83,81.97 90 bottom
I2C5  JUMPER-SMT_3_2-NC_TRACE_SILK  [SMT-JUMPER_3_2-NC_TRACE_SILK]  69.52,81.97 90 bottom
I2C6  JUMPER-SMT_3_2-NC_TRACE_SILK  [SMT-JUMPER_3_2-NC_TRACE_SILK]  25.83,110.42 90 bottom
I2C7  JUMPER-SMT_3_2-NC_TRACE_SILK  [SMT-JUMPER_3_2-NC_TRACE_SILK]  69.52,110.42 90 bottom
I2C8  JUMPER-SMT_3_2-NC_TRACE_SILK  [SMT-JUMPER_3_2-NC_TRACE_SILK]  25.83,138.87 90 bottom
I2C9  JUMPER-SMT_3_2-NC_TRACE_SILK  [SMT-JUMPER_3_2-NC_TRACE_SILK]  69.52,138.87 90 bottom
J1  QWIIC  [JST04_1MM_RA]  29.72,27.18 180 top
J2  TRS_INPUT  [AUDIO-JACK-3.5MM-SMD]  20.79,32.25 270 top
J3  QWIIC  [JST04_1MM_RA]  73.41,27.18 180 top
J4  [SCREWTERMINAL-3.5MM-2]  40.1,28.66 180 top
J5  [SCREWTERMINAL-3.5MM-4]  46.23,14.31 90 top
J6  SCREW  [SCREWTERMINAL-3.5MM-4]  10.67,24.81 270 top
J7  TRS_INPUT  [AUDIO-JACK-3.5MM-SMD]  64.48,32.25 270 top
J8  [SCREWTERMINAL-3.5MM-4]  89.92,14.31 90 top
J9  [SCREWTERMINAL-3.5MM-2]  83.79,28.66 180 top
J10  SCREW  [SCREWTERMINAL-3.5MM-4]  54.36,24.81 270 top
J11  QWIIC  [JST04_1MM_RA]  29.72,55.63 180 top
J12  TRS_INPUT  [AUDIO-JACK-3.5MM-SMD]  20.79,60.69 270 top
J13  [SCREWTERMINAL-3.5MM-4]  46.23,42.76 90 top
J14  [SCREWTERMINAL-3.5MM-2]  40.1,57.11 180 top
J15  SCREW  [SCREWTERMINAL-3.5MM-4]  10.67,53.26 270 top
J16  QWIIC  [JST04_1MM_RA]  73.41,55.63 180 top
J17  TRS_INPUT  [AUDIO-JACK-3.5MM-SMD]  64.48,60.69 270 top
J18  [SCREWTERMINAL-3.5MM-4]  89.92,42.76 90 top
J19  [SCREWTERMINAL-3.5MM-2]  83.79,57.11 180 top
J20  SCREW  [SCREWTERMINAL-3.5MM-4]  54.36,53.26 270 top
J21  QWIIC  [JST04_1MM_RA]  29.72,84.07 180 top
J22  TRS_INPUT  [AUDIO-JACK-3.5MM-SMD]  20.79,89.14 270 top
J23  [SCREWTERMINAL-3.5MM-4]  46.23,71.2 90 top
J24  [SCREWTERMINAL-3.5MM-2]  40.1,85.56 180 top
J25  SCREW  [SCREWTERMINAL-3.5MM-4]  10.67,81.7 270 top
J26  QWIIC  [JST04_1MM_RA]  73.41,84.07 180 top
J27  TRS_INPUT  [AUDIO-JACK-3.5MM-SMD]  64.48,89.14 270 top
J28  [SCREWTERMINAL-3.5MM-4]  89.92,71.2 90 top
J29  [SCREWTERMINAL-3.5MM-2]  83.79,85.56 180 top
J30  SCREW  [SCREWTERMINAL-3.5MM-4]  54.36,81.7 270 top
J31  QWIIC  [JST04_1MM_RA]  29.72,112.52 180 top
J32  TRS_INPUT  [AUDIO-JACK-3.5MM-SMD]  20.79,117.59 270 top
J33  [SCREWTERMINAL-3.5MM-4]  46.23,99.65 90 top
J34  [SCREWTERMINAL-3.5MM-2]  40.1,114.01 180 top
J35  SCREW  [SCREWTERMINAL-3.5MM-4]  10.67,110.15 270 top
J36  QWIIC  [JST04_1MM_RA]  73.41,112.52 180 top
J37  TRS_INPUT  [AUDIO-JACK-3.5MM-SMD]  64.48,117.59 270 top
J38  [SCREWTERMINAL-3.5MM-4]  89.92,99.65 90 top
J39  [SCREWTERMINAL-3.5MM-2]  83.79,114.01 180 top
J40  SCREW  [SCREWTERMINAL-3.5MM-4]  54.36,110.15 270 top
J41  QWIIC  [JST04_1MM_RA]  29.72,140.97 180 top
J42  TRS_INPUT  [AUDIO-JACK-3.5MM-SMD]  20.79,146.04 270 top
J43  [SCREWTERMINAL-3.5MM-4]  46.23,128.1 90 top
J44  [SCREWTERMINAL-3.5MM-2]  40.1,142.46 180 top
J45  SCREW  [SCREWTERMINAL-3.5MM-4]  10.67,138.6 270 top
J46  QWIIC  [JST04_1MM_RA]  73.41,140.97 180 top
J47  TRS_INPUT  [AUDIO-JACK-3.5MM-SMD]  64.48,146.04 270 top
J48  [SCREWTERMINAL-3.5MM-4]  89.92,128.1 90 top
J49  [SCREWTERMINAL-3.5MM-2]  83.79,142.46 180 top
J50  SCREW  [SCREWTERMINAL-3.5MM-4]  54.36,138.6 270 top
JP1  JP1  [SMT-JUMPER_2_NO_SILK]  30.63,30.08 180 bottom
JP2  JP1  [SMT-JUMPER_2_NO_SILK]  74.32,30.08 180 bottom
JP3  JP1  [SMT-JUMPER_2_NO_SILK]  30.63,58.53 180 bottom
JP4  JP1  [SMT-JUMPER_2_NO_SILK]  74.32,58.53 180 bottom
JP5  JP1  [SMT-JUMPER_2_NO_SILK]  30.63,86.98 180 bottom
JP6  JP1  [SMT-JUMPER_2_NO_SILK]  74.32,86.98 180 bottom
JP7  JP1  [SMT-JUMPER_2_NO_SILK]  30.63,115.43 180 bottom
JP8  JP1  [SMT-JUMPER_2_NO_SILK]  74.32,115.43 180 bottom
JP9  JP1  [SMT-JUMPER_2_NO_SILK]  30.63,143.87 180 bottom
JP10  JP1  [SMT-JUMPER_2_NO_SILK]  74.32,143.87 180 bottom
L1  220Ω  [0805]  35.49,12.36 0 top
L2  220Ω  [0805]  35.49,14.26 0 top
L3  220Ω  [0805]  35.49,18.07 0 top
L4  220Ω  [0805]  35.49,16.17 0 top
L5  220Ω  [0805]  79.17,12.36 0 top
L6  220Ω  [0805]  79.17,14.26 0 top
L7  220Ω  [0805]  79.17,18.07 0 top
L8  220Ω  [0805]  79.17,16.17 0 top
L9  220Ω  [0805]  35.49,40.81 0 top
L10  220Ω  [0805]  35.49,42.71 0 top
L11  220Ω  [0805]  35.49,46.52 0 top
L12  220Ω  [0805]  35.49,44.62 0 top
L13  220Ω  [0805]  79.17,40.81 0 top
L14  220Ω  [0805]  79.17,42.71 0 top
L15  220Ω  [0805]  79.17,46.52 0 top
L16  220Ω  [0805]  79.17,44.62 0 top
L17  220Ω  [0805]  35.49,69.25 0 top
L18  220Ω  [0805]  35.49,71.16 0 top
L19  220Ω  [0805]  35.49,74.97 0 top
L20  220Ω  [0805]  35.49,73.06 0 top
L21  220Ω  [0805]  79.17,69.25 0 top
L22  220Ω  [0805]  79.17,71.16 0 top
L23  220Ω  [0805]  79.17,74.97 0 top
L24  220Ω  [0805]  79.17,73.06 0 top
L25  220Ω  [0805]  35.49,97.7 0 top
L26  220Ω  [0805]  35.49,99.61 0 top
L27  220Ω  [0805]  35.49,103.42 0 top
L28  220Ω  [0805]  35.49,101.51 0 top
L29  220Ω  [0805]  79.17,97.7 0 top
L30  220Ω  [0805]  79.17,99.61 0 top
L31  220Ω  [0805]  79.17,103.42 0 top
L32  220Ω  [0805]  79.17,101.51 0 top
L33  220Ω  [0805]  35.49,126.15 0 top
L34  220Ω  [0805]  35.49,128.05 0 top
L35  220Ω  [0805]  35.49,131.86 0 top
L36  220Ω  [0805]  35.49,129.96 0 top
L37  220Ω  [0805]  79.17,126.15 0 top
L38  220Ω  [0805]  79.17,128.05 0 top
L39  220Ω  [0805]  79.17,131.86 0 top
L40  220Ω  [0805]  79.17,129.96 0 top
LED  [SMT-JUMPER_2_NC_TRACE_SILK]  43.47,29.08 0 bottom
LED1  [SMT-JUMPER_2_NC_TRACE_SILK]  87.16,29.08 0 bottom
LED2  [SMT-JUMPER_2_NC_TRACE_SILK]  43.47,57.53 0 bottom
LED3  [SMT-JUMPER_2_NC_TRACE_SILK]  87.16,57.53 0 bottom
LED4  [SMT-JUMPER_2_NC_TRACE_SILK]  43.47,85.98 0 bottom
LED5  [SMT-JUMPER_2_NC_TRACE_SILK]  87.16,85.98 0 bottom
LED6  [SMT-JUMPER_2_NC_TRACE_SILK]  43.47,114.43 0 bottom
LED7  [SMT-JUMPER_2_NC_TRACE_SILK]  87.16,114.43 0 bottom
LED8  [SMT-JUMPER_2_NC_TRACE_SILK]  43.47,142.88 0 bottom
LED9  [SMT-JUMPER_2_NC_TRACE_SILK]  87.16,142.88 0 bottom
LOGO1  QWIIC_LOGO_4MM  [QWIIC_5MM]  20.84,12.05 0 top
LOGO2  SFE_LOGO_NAME_FLAME.1_INCH  [SFE_LOGO_NAME_FLAME_.1]  37.98,14.7 270 bottom
LOGO3  QWIIC_LOGO_4MM  [QWIIC_4MM]  29.81,25.68 0 top
LOGO4  OSHW-LOGOS  [OSHW-LOGO-S]  13.43,29.62 0 top
LOGO5  SFE_LOGO_NAME_FLAME.1_INCH  [SFE_LOGO_NAME_FLAME_.1]  81.67,14.7 270 bottom
LOGO6  QWIIC_LOGO_4MM  [QWIIC_4MM]  73.5,25.68 0 top
LOGO7  OSHW-LOGOS  [OSHW-LOGO-S]  57.12,29.62 0 top
LOGO8  QWIIC_LOGO_4MM  [QWIIC_5MM]  64.53,12.05 0 top
LOGO9  SFE_LOGO_NAME_FLAME.1_INCH  [SFE_LOGO_NAME_FLAME_.1]  37.98,43.15 270 bottom
LOGO10  QWIIC_LOGO_4MM  [QWIIC_4MM]  29.81,54.13 0 top
LOGO11  OSHW-LOGOS  [OSHW-LOGO-S]  13.43,58.07 0 top
LOGO12  QWIIC_LOGO_4MM  [QWIIC_5MM]  20.84,40.5 0 top
LOGO13  SFE_LOGO_NAME_FLAME.1_INCH  [SFE_LOGO_NAME_FLAME_.1]  81.67,43.15 270 bottom
LOGO14  QWIIC_LOGO_4MM  [QWIIC_4MM]  73.5,54.13 0 top
LOGO15  OSHW-LOGOS  [OSHW-LOGO-S]  57.12,58.07 0 top
LOGO16  QWIIC_LOGO_4MM  [QWIIC_5MM]  64.53,40.5 0 top
LOGO17  SFE_LOGO_NAME_FLAME.1_INCH  [SFE_LOGO_NAME_FLAME_.1]  37.98,71.6 270 bottom
LOGO18  QWIIC_LOGO_4MM  [QWIIC_4MM]  29.81,82.58 0 top
LOGO19  OSHW-LOGOS  [OSHW-LOGO-S]  13.43,86.52 0 top
LOGO20  QWIIC_LOGO_4MM  [QWIIC_5MM]  20.84,68.95 0 top
LOGO21  SFE_LOGO_NAME_FLAME.1_INCH  [SFE_LOGO_NAME_FLAME_.1]  81.67,71.6 270 bottom
LOGO22  QWIIC_LOGO_4MM  [QWIIC_4MM]  73.5,82.58 0 top
LOGO23  OSHW-LOGOS  [OSHW-LOGO-S]  57.12,86.52 0 top
LOGO24  QWIIC_LOGO_4MM  [QWIIC_5MM]  64.53,68.95 0 top
LOGO25  SFE_LOGO_NAME_FLAME.1_INCH  [SFE_LOGO_NAME_FLAME_.1]  37.98,100.05 270 bottom
LOGO26  QWIIC_LOGO_4MM  [QWIIC_4MM]  29.81,111.03 0 top
LOGO27  OSHW-LOGOS  [OSHW-LOGO-S]  13.43,114.97 0 top
LOGO28  QWIIC_LOGO_4MM  [QWIIC_5MM]  20.84,97.39 0 top
LOGO29  SFE_LOGO_NAME_FLAME.1_INCH  [SFE_LOGO_NAME_FLAME_.1]  81.67,100.05 270 bottom
LOGO30  QWIIC_LOGO_4MM  [QWIIC_4MM]  73.5,111.03 0 top
LOGO31  OSHW-LOGOS  [OSHW-LOGO-S]  57.12,114.97 0 top
LOGO32  QWIIC_LOGO_4MM  [QWIIC_5MM]  64.53,97.39 0 top
LOGO33  SFE_LOGO_NAME_FLAME.1_INCH  [SFE_LOGO_NAME_FLAME_.1]  37.98,128.5 270 bottom
LOGO34  QWIIC_LOGO_4MM  [QWIIC_4MM]  29.81,139.47 0 top
LOGO35  OSHW-LOGOS  [OSHW-LOGO-S]  13.43,143.42 0 top
LOGO36  QWIIC_LOGO_4MM  [QWIIC_5MM]  20.84,125.84 0 top
LOGO37  SFE_LOGO_NAME_FLAME.1_INCH  [SFE_LOGO_NAME_FLAME_.1]  81.67,128.5 270 bottom
LOGO38  QWIIC_LOGO_4MM  [QWIIC_4MM]  73.5,139.47 0 top
LOGO39  OSHW-LOGOS  [OSHW-LOGO-S]  57.12,143.42 0 top
LOGO40  QWIIC_LOGO_4MM  [QWIIC_5MM]  64.53,125.84 0 top
R1  100k  [0402-TIGHT]  25.46,16.06 90 top
R2  2.2k  [0402-TIGHT]  26.35,25.75 180 top
R3  2.2k  [0402-TIGHT]  26.35,24.7 180 top
R4  100  [0402-TIGHT]  26.97,10.83 0 top
R5  1k  [0402-TIGHT]  35.9,23.26 90 top
R6  100  [0402-TIGHT]  26.94,20.06 0 top
R7  2.2k  [0402-TIGHT]  70.04,25.75 180 top
R8  2.2k  [0402-TIGHT]  70.04,24.7 180 top
R9  100  [0402-TIGHT]  70.66,10.83 0 top
R10  100  [0402-TIGHT]  70.63,20.06 0 top
R11  100k  [0402-TIGHT]  69.15,16.06 90 top
R12  1k  [0402-TIGHT]  79.59,23.26 90 top
R13  2.2k  [0402-TIGHT]  26.35,54.2 180 top
R14  2.2k  [0402-TIGHT]  26.35,53.15 180 top
R15  100  [0402-TIGHT]  26.97,39.28 0 top
R16  100  [0402-TIGHT]  26.94,48.51 0 top
R17  100k  [0402-TIGHT]  25.46,44.51 90 top
R18  1k  [0402-TIGHT]  35.9,51.71 90 top
R19  2.2k  [0402-TIGHT]  70.04,54.2 180 top
R20  2.2k  [0402-TIGHT]  70.04,53.15 180 top
R21  100  [0402-TIGHT]  70.66,39.28 0 top
R22  100  [0402-TIGHT]  70.63,48.51 0 top
R23  100k  [0402-TIGHT]  69.15,44.51 90 top
R24  1k  [0402-TIGHT]  79.59,51.71 90 top
R25  2.2k  [0402-TIGHT]  26.35,82.65 180 top
R26  2.2k  [0402-TIGHT]  26.35,81.59 180 top
R27  100  [0402-TIGHT]  26.97,67.73 0 top
R28  100  [0402-TIGHT]  26.94,76.95 0 top
R29  100k  [0402-TIGHT]  25.46,72.95 90 top
R30  1k  [0402-TIGHT]  35.9,80.16 90 top
R31  2.2k  [0402-TIGHT]  70.04,82.65 180 top
R32  2.2k  [0402-TIGHT]  70.04,81.59 180 top
R33  100  [0402-TIGHT]  70.66,67.73 0 top
R34  100  [0402-TIGHT]  70.63,76.95 0 top
R35  100k  [0402-TIGHT]  69.15,72.95 90 top
R36  1k  [0402-TIGHT]  79.59,80.16 90 top
R37  2.2k  [0402-TIGHT]  26.35,111.1 180 top
R38  2.2k  [0402-TIGHT]  26.35,110.04 180 top
R39  100  [0402-TIGHT]  26.97,96.17 0 top
R40  100  [0402-TIGHT]  26.94,105.4 0 top
R41  100k  [0402-TIGHT]  25.46,101.4 90 top
R42  1k  [0402-TIGHT]  35.9,108.61 90 top
R43  2.2k  [0402-TIGHT]  70.04,111.1 180 top
R44  2.2k  [0402-TIGHT]  70.04,110.04 180 top
R45  100  [0402-TIGHT]  70.66,96.17 0 top
R46  100  [0402-TIGHT]  70.63,105.4 0 top
R47  100k  [0402-TIGHT]  69.15,101.4 90 top
R48  1k  [0402-TIGHT]  79.59,108.61 90 top
R49  2.2k  [0402-TIGHT]  26.35,139.55 180 top
R50  2.2k  [0402-TIGHT]  26.35,138.49 180 top
R51  100  [0402-TIGHT]  26.97,124.62 0 top
R52  100  [0402-TIGHT]  26.94,133.85 0 top
R53  100k  [0402-TIGHT]  25.46,129.85 90 top
R54  1k  [0402-TIGHT]  35.9,137.05 90 top
R55  2.2k  [0402-TIGHT]  70.04,139.55 180 top
R56  2.2k  [0402-TIGHT]  70.04,138.49 180 top
R57  100  [0402-TIGHT]  70.66,124.62 0 top
R58  100  [0402-TIGHT]  70.63,133.85 0 top
R59  100k  [0402-TIGHT]  69.15,129.85 90 top
R60  1k  [0402-TIGHT]  79.59,137.05 90 top
TP1  [TP_15TH]  28.45,28.45 0 top
TP2  [TP_15TH]  28.45,24.64 0 top
TP3  [TP_15TH]  72.14,28.45 0 top
TP4  [TP_15TH]  72.14,24.64 0 top
TP5  [TP_15TH]  28.45,56.9 0 top
TP6  [TP_15TH]  28.45,53.09 0 top
TP7  [TP_15TH]  72.14,56.9 0 top
TP8  [TP_15TH]  72.14,53.09 0 top
TP9  [TP_15TH]  28.45,85.34 0 top
TP10  [TP_15TH]  28.45,81.53 0 top
TP11  [TP_15TH]  72.14,85.34 0 top
TP12  [TP_15TH]  72.14,81.53 0 top
TP13  [TP_15TH]  28.45,113.79 0 top
TP14  [TP_15TH]  28.45,109.98 0 top
TP15  [TP_15TH]  72.14,113.79 0 top
TP16  [TP_15TH]  72.14,109.98 0 top
TP17  [TP_15TH]  28.45,142.24 0 top
TP18  [TP_15TH]  28.45,138.43 0 top
TP19  [TP_15TH]  72.14,142.24 0 top
TP20  [TP_15TH]  72.14,138.43 0 top
U1  TPA2016D2  [QFN-20-0.5MM]  74.09,15.53 0 top
U2  TPA2016D2  [QFN-20-0.5MM]  30.41,43.98 0 top
U3  TPA2016D2  [QFN-20-0.5MM]  74.09,43.98 0 top
U4  TPA2016D2  [QFN-20-0.5MM]  30.41,72.43 0 top
U5  TPA2016D2  [QFN-20-0.5MM]  74.09,72.43 0 top
U6  TPA2016D2  [QFN-20-0.5MM]  30.41,15.53 0 top
U7  TPA2016D2  [QFN-20-0.5MM]  30.41,100.88 0 top
U8  TPA2016D2  [QFN-20-0.5MM]  74.09,100.88 0 top
U9  TPA2016D2  [QFN-20-0.5MM]  30.41,129.32 0 top
U10  TPA2016D2  [QFN-20-0.5MM]  74.09,129.32 0 top
U$1  [SPEAKER0]  20.83,10.36 0 top
U$2  [#I2C#0]  27.45,25.14 270 bottom
U$3  [INPUT0]  24.67,24.37 90 top
U$4  [SPEAKER0]  21.98,14.01 0 bottom
U$5  [PWR26]  38.35,22.59 0 top
U$6  [AMP0]  20.82,9.02 0 top
U$7  [QWIIC_5.5MM]  22.23,15.79 0 bottom
U$8  [AMP0]  22.1,12.48 0 bottom
U$9  [###15]  42.12,14.31 0 top
U$10  [###16]  42.16,21.32 0 top
U$11  [###16]  42.09,17.81 0 top
U$12  [###15]  42.12,24.44 0 top
U$13  [##SHDN##3]  13.77,14.3 0 bottom
U$14  [R21]  42.09,22.84 0 top
U$15  [#VIN#24]  34.34,30.71 90 top
U$16  [L5]  42.08,16.1 0 top
U$17  [#R#11]  14.78,21.3 0 top
U$18  [#L#33]  12.38,17.82 0 bottom
U$19  [#L#12]  14.75,17.82 0 top
U$20  [#GND#25]  42.4,30.49 90 top
U$21  [SPK_OUT22]  46.27,27.31 0 top
U$22  [AUD_IN23]  10.71,27.27 0 top
U$23  [2#5#5#5V24]  38.28,30.85 0 bottom
U$24  [#LED#27]  43.49,27.44 0 bottom
U$25  [#GND#25]  15.63,24.81 0 top
U$26  [#VIN#30]  36.64,26.1 270 bottom
U$27  [#GND#31]  40.17,25.92 270 bottom
U$28  [#R#34]  12.4,21.31 0 bottom
U$29  [#GND#25]  13.12,24.82 0 bottom
U$30  [SFE_LOGO_NAME_FLAME_.1]  39.04,8.79 0 top
U$31  [###40]  48.89,24.77 0 bottom
U$32  [###40]  48.9,14.31 0 bottom
U$33  [SPEAKER_OUT37]  42.88,19.54 270 bottom
U$34  [AUDIO_IN39]  11.3,26.8 0 bottom
U$35  [###41]  48.89,21.3 0 bottom
U$36  [###41]  48.89,17.78 0 bottom
U$37  [#LEFT#43]  44.47,16.03 270 bottom
U$38  [#RIGHT#44]  44.49,22.92 270 bottom
U$39  [#JP1#2]  27.93,30.04 0 bottom
U$40  [##SHDN##2]  16.29,14.31 0 top
U$41  [AMP0]  64.51,9.02 0 top
U$42  [SPEAKER0]  64.52,10.36 0 top
U$43  [INPUT0]  68.35,24.37 90 top
U$44  [#I2C#0]  71.14,25.14 270 bottom
U$45  [SPEAKER0]  65.66,14.01 0 bottom
U$46  [QWIIC_5.5MM]  65.92,15.79 0 bottom
U$47  [AMP0]  65.79,12.48 0 bottom
U$48  [L5]  85.77,16.1 0 top
U$49  [#R#11]  58.47,21.3 0 top
U$50  [#L#12]  58.44,17.82 0 top
U$51  [###15]  85.8,14.31 0 top
U$52  [###16]  85.77,17.81 0 top
U$53  [###16]  85.85,21.32 0 top
U$54  [###15]  85.81,24.44 0 top
U$55  [R21]  85.77,22.84 0 top
U$56  [SPK_OUT22]  89.96,27.31 0 top
U$57  [AUD_IN23]  54.39,27.27 0 top
U$58  [2#5#5#5V24]  81.97,30.85 0 bottom
U$59  [#VIN#24]  78.02,30.71 90 top
U$60  [#GND#25]  86.09,30.49 90 top
U$61  [PWR26]  82.04,22.59 0 top
U$62  [#LED#27]  87.18,27.44 0 bottom
U$63  [#GND#25]  59.32,24.81 0 top
U$64  [#VIN#30]  80.33,26.1 270 bottom
U$65  [#GND#31]  83.85,25.92 270 bottom
U$66  [#L#33]  56.07,17.82 0 bottom
U$67  [#R#34]  56.09,21.31 0 bottom
U$68  [#GND#25]  56.81,24.82 0 bottom
U$69  [SPEAKER_OUT37]  86.57,19.54 270 bottom
U$70  [AUDIO_IN39]  54.99,26.8 0 bottom
U$71  [###40]  92.58,24.77 0 bottom
U$72  [###40]  92.59,14.31 0 bottom
U$73  [###41]  92.58,21.3 0 bottom
U$74  [###41]  92.58,17.78 0 bottom
U$75  [#LEFT#43]  88.15,16.03 270 bottom
U$76  [#RIGHT#44]  88.17,22.92 270 bottom
U$77  [#JP1#2]  71.62,30.04 0 bottom
U$78  [##SHDN##2]  59.98,14.31 0 top
U$79  [##SHDN##3]  57.45,14.3 0 bottom
U$80  [SFE_LOGO_NAME_FLAME_.1]  82.73,8.79 0 top
U$81  [AMP0]  20.82,37.47 0 top
U$82  [SPEAKER0]  20.83,38.8 0 top
U$83  [INPUT0]  24.67,52.82 90 top
U$84  [#I2C#0]  27.45,53.58 270 bottom
U$85  [SPEAKER0]  21.98,42.46 0 bottom
U$86  [QWIIC_5.5MM]  22.23,44.23 0 bottom
U$87  [AMP0]  22.1,40.93 0 bottom
U$88  [L5]  42.08,44.55 0 top
U$89  [#R#11]  14.78,49.75 0 top
U$90  [#L#12]  14.75,46.27 0 top
U$91  [###15]  42.12,42.76 0 top
U$92  [###16]  42.09,46.26 0 top
U$93  [###16]  42.16,49.77 0 top
U$94  [###15]  42.12,52.89 0 top
U$95  [R21]  42.09,51.29 0 top
U$96  [SPK_OUT22]  46.27,55.76 0 top
U$97  [AUD_IN23]  10.71,55.72 0 top
U$98  [2#5#5#5V24]  38.28,59.3 0 bottom
U$99  [#VIN#24]  34.34,59.16 90 top
U$100  [#GND#25]  42.4,58.94 90 top
U$101  [PWR26]  38.35,51.04 0 top
U$102  [#LED#27]  43.49,55.89 0 bottom
U$103  [#GND#25]  15.63,53.25 0 top
U$104  [#VIN#30]  36.64,54.55 270 bottom
U$105  [#GND#31]  40.17,54.37 270 bottom
U$106  [#L#33]  12.38,46.27 0 bottom
U$107  [#R#34]  12.4,49.76 0 bottom
U$108  [#GND#25]  13.12,53.26 0 bottom
U$109  [SPEAKER_OUT37]  42.88,47.99 270 bottom
U$110  [AUDIO_IN39]  11.3,55.24 0 bottom
U$111  [###40]  48.89,53.21 0 bottom
U$112  [###40]  48.9,42.76 0 bottom
U$113  [###41]  48.89,49.75 0 bottom
U$114  [###41]  48.89,46.23 0 bottom
U$115  [#LEFT#43]  44.47,44.48 270 bottom
U$116  [#RIGHT#44]  44.49,51.37 270 bottom
U$117  [#JP1#2]  27.93,58.49 0 bottom
U$118  [##SHDN##2]  16.29,42.75 0 top
U$119  [##SHDN##3]  13.77,42.75 0 bottom
U$120  [SFE_LOGO_NAME_FLAME_.1]  39.04,37.24 0 top
U$121  [AMP0]  64.51,37.47 0 top
U$122  [SPEAKER0]  64.52,38.8 0 top
U$123  [INPUT0]  68.35,52.82 90 top
U$124  [#I2C#0]  71.14,53.58 270 bottom
U$125  [SPEAKER0]  65.66,42.46 0 bottom
U$126  [QWIIC_5.5MM]  65.92,44.23 0 bottom
U$127  [AMP0]  65.79,40.93 0 bottom
U$128  [L5]  85.77,44.55 0 top
U$129  [#R#11]  58.47,49.75 0 top
U$130  [#L#12]  58.44,46.27 0 top
U$131  [###15]  85.8,42.76 0 top
U$132  [###16]  85.77,46.26 0 top
U$133  [###16]  85.85,49.77 0 top
U$134  [###15]  85.81,52.89 0 top
U$135  [R21]  85.77,51.29 0 top
U$136  [SPK_OUT22]  89.96,55.76 0 top
U$137  [AUD_IN23]  54.39,55.72 0 top
U$138  [2#5#5#5V24]  81.97,59.3 0 bottom
U$139  [#VIN#24]  78.02,59.16 90 top
U$140  [#GND#25]  86.09,58.94 90 top
U$141  [PWR26]  82.04,51.04 0 top
U$142  [#LED#27]  87.18,55.89 0 bottom
U$143  [#GND#25]  59.32,53.25 0 top
U$144  [#VIN#30]  80.33,54.55 270 bottom
U$145  [#GND#31]  83.85,54.37 270 bottom
U$146  [#L#33]  56.07,46.27 0 bottom
U$147  [#R#34]  56.09,49.76 0 bottom
U$148  [#GND#25]  56.81,53.26 0 bottom
U$149  [SPEAKER_OUT37]  86.57,47.99 270 bottom
U$150  [AUDIO_IN39]  54.99,55.24 0 bottom
U$151  [###40]  92.58,53.21 0 bottom
U$152  [###40]  92.59,42.76 0 bottom
U$153  [###41]  92.58,49.75 0 bottom
U$154  [###41]  92.58,46.23 0 bottom
U$155  [#LEFT#43]  88.15,44.48 270 bottom
U$156  [#RIGHT#44]  88.17,51.37 270 bottom
U$157  [#JP1#2]  71.62,58.49 0 bottom
U$158  [##SHDN##2]  59.98,42.75 0 top
U$159  [##SHDN##3]  57.45,42.75 0 bottom
U$160  [SFE_LOGO_NAME_FLAME_.1]  82.73,37.24 0 top
U$161  [AMP0]  20.82,65.92 0 top
U$162  [SPEAKER0]  20.83,67.25 0 top
U$163  [INPUT0]  24.67,81.27 90 top
U$164  [#I2C#0]  27.45,82.03 270 bottom
U$165  [SPEAKER0]  21.98,70.9 0 bottom
U$166  [QWIIC_5.5MM]  22.23,72.68 0 bottom
U$167  [AMP0]  22.1,69.38 0 bottom
U$168  [L5]  42.08,73 0 top
U$169  [#R#11]  14.78,78.19 0 top
U$170  [#L#12]  14.75,74.71 0 top
U$171  [###15]  42.12,71.21 0 top
U$172  [###16]  42.09,74.7 0 top
U$173  [###16]  42.16,78.22 0 top
U$174  [###15]  42.12,81.34 0 top
U$175  [R21]  42.09,79.74 0 top
U$176  [SPK_OUT22]  46.27,84.2 0 top
U$177  [AUD_IN23]  10.71,84.17 0 top
U$178  [2#5#5#5V24]  38.28,87.75 0 bottom
U$179  [#VIN#24]  34.34,87.61 90 top
U$180  [#GND#25]  42.4,87.39 90 top
U$181  [PWR26]  38.35,79.48 0 top
U$182  [#LED#27]  43.49,84.34 0 bottom
U$183  [#GND#25]  15.63,81.7 0 top
U$184  [#VIN#30]  36.64,82.99 270 bottom
U$185  [#GND#31]  40.17,82.82 270 bottom
U$186  [#L#33]  12.38,74.72 0 bottom
U$187  [#R#34]  12.4,78.2 0 bottom
U$188  [#GND#25]  13.12,81.71 0 bottom
U$189  [SPEAKER_OUT37]  42.88,76.43 270 bottom
U$190  [AUDIO_IN39]  11.3,83.69 0 bottom
U$191  [###40]  48.89,81.66 0 bottom
U$192  [###40]  48.9,71.21 0 bottom
U$193  [###41]  48.89,78.19 0 bottom
U$194  [###41]  48.89,74.68 0 bottom
U$195  [#LEFT#43]  44.47,72.93 270 bottom
U$196  [#RIGHT#44]  44.49,79.81 270 bottom
U$197  [#JP1#2]  27.93,86.94 0 bottom
U$198  [##SHDN##2]  16.29,71.2 0 top
U$199  [##SHDN##3]  13.77,71.19 0 bottom
U$200  [SFE_LOGO_NAME_FLAME_.1]  39.04,65.69 0 top
U$201  [AMP0]  64.51,65.92 0 top
U$202  [SPEAKER0]  64.52,67.25 0 top
U$203  [INPUT0]  68.35,81.27 90 top
U$204  [#I2C#0]  71.14,82.03 270 bottom
U$205  [SPEAKER0]  65.66,70.9 0 bottom
U$206  [QWIIC_5.5MM]  65.92,72.68 0 bottom
U$207  [AMP0]  65.79,69.38 0 bottom
U$208  [L5]  85.77,73 0 top
U$209  [#R#11]  58.47,78.19 0 top
U$210  [#L#12]  58.44,74.71 0 top
U$211  [###15]  85.8,71.21 0 top
U$212  [###16]  85.77,74.7 0 top
U$213  [###16]  85.85,78.22 0 top
U$214  [###15]  85.81,81.34 0 top
U$215  [R21]  85.77,79.74 0 top
U$216  [SPK_OUT22]  89.96,84.2 0 top
U$217  [AUD_IN23]  54.39,84.17 0 top
U$218  [2#5#5#5V24]  81.97,87.75 0 bottom
U$219  [#VIN#24]  78.02,87.61 90 top
U$220  [#GND#25]  86.09,87.39 90 top
U$221  [PWR26]  82.04,79.48 0 top
U$222  [#LED#27]  87.18,84.34 0 bottom
U$223  [#GND#25]  59.32,81.7 0 top
U$224  [#VIN#30]  80.33,82.99 270 bottom
U$225  [#GND#31]  83.85,82.82 270 bottom
U$226  [#L#33]  56.07,74.72 0 bottom
U$227  [#R#34]  56.09,78.2 0 bottom
U$228  [#GND#25]  56.81,81.71 0 bottom
U$229  [SPEAKER_OUT37]  86.57,76.43 270 bottom
U$230  [AUDIO_IN39]  54.99,83.69 0 bottom
U$231  [###40]  92.58,81.66 0 bottom
U$232  [###40]  92.59,71.21 0 bottom
U$233  [###41]  92.58,78.19 0 bottom
U$234  [###41]  92.58,74.68 0 bottom
U$235  [#LEFT#43]  88.15,72.93 270 bottom
U$236  [#RIGHT#44]  88.17,79.81 270 bottom
U$237  [#JP1#2]  71.62,86.94 0 bottom
U$238  [##SHDN##2]  59.98,71.2 0 top
U$239  [##SHDN##3]  57.45,71.19 0 bottom
U$240  [SFE_LOGO_NAME_FLAME_.1]  82.73,65.69 0 top
U$241  [AMP0]  20.82,94.37 0 top
U$242  [SPEAKER0]  20.83,95.7 0 top
U$243  [INPUT0]  24.67,109.72 90 top
U$244  [#I2C#0]  27.45,110.48 270 bottom
U$245  [SPEAKER0]  21.98,99.35 0 bottom
U$246  [QWIIC_5.5MM]  22.23,101.13 0 bottom
U$247  [AMP0]  22.1,97.83 0 bottom
U$248  [L5]  42.08,101.45 0 top
U$249  [#R#11]  14.78,106.64 0 top
U$250  [#L#12]  14.75,103.16 0 top
U$251  [###15]  42.12,99.66 0 top
U$252  [###16]  42.09,103.15 0 top
U$253  [###16]  42.16,106.67 0 top
U$254  [###15]  42.12,109.79 0 top
U$255  [R21]  42.09,108.19 0 top
U$256  [SPK_OUT22]  46.27,112.65 0 top
U$257  [AUD_IN23]  10.71,112.62 0 top
U$258  [2#5#5#5V24]  38.28,116.19 0 bottom
U$259  [#VIN#24]  34.34,116.06 90 top
U$260  [#GND#25]  42.4,115.83 90 top
U$261  [PWR26]  38.35,107.93 0 top
U$262  [#LED#27]  43.49,112.79 0 bottom
U$263  [#GND#25]  15.63,110.15 0 top
U$264  [#VIN#30]  36.64,111.44 270 bottom
U$265  [#GND#31]  40.17,111.27 270 bottom
U$266  [#L#33]  12.38,103.17 0 bottom
U$267  [#R#34]  12.4,106.65 0 bottom
U$268  [#GND#25]  13.12,110.16 0 bottom
U$269  [SPEAKER_OUT37]  42.88,104.88 270 bottom
U$270  [AUDIO_IN39]  11.3,112.14 0 bottom
U$271  [###40]  48.89,110.11 0 bottom
U$272  [###40]  48.9,99.65 0 bottom
U$273  [###41]  48.89,106.64 0 bottom
U$274  [###41]  48.89,103.12 0 bottom
U$275  [#LEFT#43]  44.47,101.38 270 bottom
U$276  [#RIGHT#44]  44.49,108.26 270 bottom
U$277  [#JP1#2]  27.93,115.39 0 bottom
U$278  [##SHDN##2]  16.29,99.65 0 top
U$279  [##SHDN##3]  13.77,99.64 0 bottom
U$280  [SFE_LOGO_NAME_FLAME_.1]  39.04,94.13 0 top
U$281  [AMP0]  64.51,94.37 0 top
U$282  [SPEAKER0]  64.52,95.7 0 top
U$283  [INPUT0]  68.35,109.72 90 top
U$284  [#I2C#0]  71.14,110.48 270 bottom
U$285  [SPEAKER0]  65.66,99.35 0 bottom
U$286  [QWIIC_5.5MM]  65.92,101.13 0 bottom
U$287  [AMP0]  65.79,97.83 0 bottom
U$288  [L5]  85.77,101.45 0 top
U$289  [#R#11]  58.47,106.64 0 top
U$290  [#L#12]  58.44,103.16 0 top
U$291  [###15]  85.8,99.66 0 top
U$292  [###16]  85.77,103.15 0 top
U$293  [###16]  85.85,106.67 0 top
U$294  [###15]  85.81,109.79 0 top
U$295  [R21]  85.77,108.19 0 top
U$296  [SPK_OUT22]  89.96,112.65 0 top
U$297  [AUD_IN23]  54.39,112.62 0 top
U$298  [2#5#5#5V24]  81.97,116.19 0 bottom
U$299  [#VIN#24]  78.02,116.06 90 top
U$300  [#GND#25]  86.09,115.83 90 top
U$301  [PWR26]  82.04,107.93 0 top
U$302  [#LED#27]  87.18,112.79 0 bottom
U$303  [#GND#25]  59.32,110.15 0 top
U$304  [#VIN#30]  80.33,111.44 270 bottom
U$305  [#GND#31]  83.85,111.27 270 bottom
U$306  [#L#33]  56.07,103.17 0 bottom
U$307  [#R#34]  56.09,106.65 0 bottom
U$308  [#GND#25]  56.81,110.16 0 bottom
U$309  [SPEAKER_OUT37]  86.57,104.88 270 bottom
U$310  [AUDIO_IN39]  54.99,112.14 0 bottom
U$311  [###40]  92.58,110.11 0 bottom
U$312  [###40]  92.59,99.65 0 bottom
U$313  [###41]  92.58,106.64 0 bottom
U$314  [###41]  92.58,103.12 0 bottom
U$315  [#LEFT#43]  88.15,101.38 270 bottom
U$316  [#RIGHT#44]  88.17,108.26 270 bottom
U$317  [#JP1#2]  71.62,115.39 0 bottom
U$318  [##SHDN##2]  59.98,99.65 0 top
U$319  [##SHDN##3]  57.45,99.64 0 bottom
U$320  [SFE_LOGO_NAME_FLAME_.1]  82.73,94.13 0 top
U$321  [AMP0]  20.82,122.82 0 top
U$322  [SPEAKER0]  20.83,124.15 0 top
U$323  [INPUT0]  24.67,138.17 90 top
U$324  [#I2C#0]  27.45,138.93 270 bottom
U$325  [SPEAKER0]  21.98,127.8 0 bottom
U$326  [QWIIC_5.5MM]  22.23,129.58 0 bottom
U$327  [AMP0]  22.1,126.28 0 bottom
U$328  [L5]  42.08,129.9 0 top
U$329  [#R#11]  14.78,135.09 0 top
U$330  [#L#12]  14.75,131.61 0 top
U$331  [###15]  42.12,128.1 0 top
U$332  [###16]  42.09,131.6 0 top
U$333  [###16]  42.16,135.12 0 top
U$334  [###15]  42.12,138.23 0 top
U$335  [R21]  42.09,136.63 0 top
U$336  [SPK_OUT22]  46.27,141.1 0 top
U$337  [AUD_IN23]  10.71,141.06 0 top
U$338  [2#5#5#5V24]  38.28,144.64 0 bottom
U$339  [#VIN#24]  34.34,144.5 90 top
U$340  [#GND#25]  42.4,144.28 90 top
U$341  [PWR26]  38.35,136.38 0 top
U$342  [#LED#27]  43.49,141.23 0 bottom
U$343  [#GND#25]  15.63,138.6 0 top
U$344  [#VIN#30]  36.64,139.89 270 bottom
U$345  [#GND#31]  40.17,139.72 270 bottom
U$346  [#L#33]  12.38,131.62 0 bottom
U$347  [#R#34]  12.4,135.1 0 bottom
U$348  [#GND#25]  13.12,138.61 0 bottom
U$349  [SPEAKER_OUT37]  42.88,133.33 270 bottom
U$350  [AUDIO_IN39]  11.3,140.59 0 bottom
U$351  [###40]  48.89,138.56 0 bottom
U$352  [###40]  48.9,128.1 0 bottom
U$353  [###41]  48.89,135.09 0 bottom
U$354  [###41]  48.89,131.57 0 bottom
U$355  [#LEFT#43]  44.47,129.82 270 bottom
U$356  [#RIGHT#44]  44.49,136.71 270 bottom
U$357  [#JP1#2]  27.93,143.84 0 bottom
U$358  [##SHDN##2]  16.29,128.1 0 top
U$359  [##SHDN##3]  13.77,128.09 0 bottom
U$360  [SFE_LOGO_NAME_FLAME_.1]  39.04,122.58 0 top
U$361  [AMP0]  64.51,122.82 0 top
U$362  [SPEAKER0]  64.52,124.15 0 top
U$363  [INPUT0]  68.35,138.17 90 top
U$364  [#I2C#0]  71.14,138.93 270 bottom
U$365  [SPEAKER0]  65.66,127.8 0 bottom
U$366  [QWIIC_5.5MM]  65.92,129.58 0 bottom
U$367  [AMP0]  65.79,126.28 0 bottom
U$368  [L5]  85.77,129.9 0 top
U$369  [#R#11]  58.47,135.09 0 top
U$370  [#L#12]  58.44,131.61 0 top
U$371  [###15]  85.8,128.1 0 top
U$372  [###16]  85.77,131.6 0 top
U$373  [###16]  85.85,135.12 0 top
U$374  [###15]  85.81,138.23 0 top
U$375  [R21]  85.77,136.63 0 top
U$376  [SPK_OUT22]  89.96,141.1 0 top
U$377  [AUD_IN23]  54.39,141.06 0 top
U$378  [2#5#5#5V24]  81.97,144.64 0 bottom
U$379  [#VIN#24]  78.02,144.5 90 top
U$380  [#GND#25]  86.09,144.28 90 top
U$381  [PWR26]  82.04,136.38 0 top
U$382  [#LED#27]  87.18,141.23 0 bottom
U$383  [#GND#25]  59.32,138.6 0 top
U$384  [#VIN#30]  80.33,139.89 270 bottom
U$385  [#GND#31]  83.85,139.72 270 bottom
U$386  [#L#33]  56.07,131.62 0 bottom
U$387  [#R#34]  56.09,135.1 0 bottom
U$388  [#GND#25]  56.81,138.61 0 bottom
U$389  [SPEAKER_OUT37]  86.57,133.33 270 bottom
U$390  [AUDIO_IN39]  54.99,140.59 0 bottom
U$391  [###40]  92.58,138.56 0 bottom
U$392  [###40]  92.59,128.1 0 bottom
U$393  [###41]  92.58,135.09 0 bottom
U$394  [###41]  92.58,131.57 0 bottom
U$395  [#LEFT#43]  88.15,129.82 270 bottom
U$396  [#RIGHT#44]  88.17,136.71 270 bottom
U$397  [#JP1#2]  71.62,143.84 0 bottom
U$398  [##SHDN##2]  59.98,128.1 0 top
U$399  [##SHDN##3]  57.45,128.09 0 bottom
U$400  [SFE_LOGO_NAME_FLAME_.1]  82.73,122.58 0 top

## Library data of the parts
C1 C3 C26 C27 C42 C43 C58 C59 C74 C75 C90 C91 C106 C107 C122 C123 C138 C139 C154 C155 = SparkFun-Capacitors; PROD_ID: CAP-14243
C2 C29 C45 C61 C77 C93 C109 C125 C141 C157 = SparkFun-Capacitors; PROD_ID: CAP-14259
C4 C14 C16 C17 C28 C30 C33 C44 C46 C49 C60 C62 C65 C76 C78 C81 C92 C94 C97 C108 C110 C113 C124 C126 C129 C140 C142 C145 C156 C158 = SparkFun-Capacitors; PROD_ID: CAP-16507
C5-C8 C13 C15 C18-C21 C31 C32 C34-C37 C47 C48 C50-C53 C63 C64 C66-C69 C79 C80 C82-C85 C95 C96 C98-C101 C111 C112 C114-C117 C127 C128 C130-C133 C143 C144 C146-C149 C159 C160 = SparkFun-Capacitors; PROD_ID: CAP-12417
C9-C12 C22-C25 C38-C41 C54-C57 C70-C73 C86-C89 C102-C105 C118-C121 C134-C137 C150-C153 = SparkFun-Capacitors; PROD_ID: CAP-15061
D1-D10 = SparkFun-LED; PROD_ID: DIO-00819
E$1-E$4 FD1-FD40 LOGO1-LOGO40 U$7 U$30 U$46 U$80 U$86 U$120 U$126 U$160 U$166 U$200 U$206 U$240 U$246 U$280 U$286 U$320 U$326 U$360 U$366 U$400 = SparkFun-Aesthetics
E$5 E$6 = SparkFun-Retired
H1-H40 = SparkFun-Hardware
I2C I2C1-I2C9 JP1-JP10 LED LED1-LED9 = SparkFun-Jumpers
J1 J3 J11 J16 J21 J26 J31 J36 J41 J46 = SparkFun-Connectors; PROD_ID: CONN-13694
J2 J7 J12 J17 J22 J27 J32 J37 J42 J47 = SparkFun-Connectors; PROD_ID: CONN-10353
J4 J9 J14 J19 J24 J29 J34 J39 J44 J49 = SparkFun-Connectors; PROD_ID: CONN-08399
J5 J6 J8 J10 J13 J15 J18 J20 J23 J25 J28 J30 J33 J35 J38 J40 J43 J45 J48 J50 = SparkFun-Connectors; PROD_ID: CONN-14485
L1-L40 = SparkFun-Coils; PROD_ID: NDUC-10201
R1 R11 R17 R23 R29 R35 R41 R47 R53 R59 = SparkFun-Resistors; PROD_ID: RES-13495
R2 R3 R7 R8 R13 R14 R19 R20 R25 R26 R31 R32 R37 R38 R43 R44 R49 R50 R55 R56 = SparkFun-Resistors; PROD_ID: RES-14341
R4 R6 R9 R10 R15 R16 R21 R22 R27 R28 R33 R34 R39 R40 R45 R46 R51 R52 R57 R58 = SparkFun-Resistors; PROD_ID: RES-14962
R5 R12 R18 R24 R30 R36 R42 R48 R54 R60 = SparkFun-Resistors; PROD_ID: RES-14342
TP1-TP20 = SparkFun-Connectors
U1-U10 = temp; PROD_ID: IC-11061
U$1-U$6 U$8-U$29 U$31-U$45 U$47-U$79 U$81-U$85 U$87-U$119 U$121-U$125 U$127-U$159 U$161-U$165 U$167-U$199 U$201-U$205 U$207-U$239 U$241-U$245 U$247-U$279 U$281-U$285 U$287-U$319 U$321-U$325 U$327-U$359 U$361-U$365 U$367-U$399 = output